# Altium PCB DSP6748_F.PcbDoc (part 1 of 16)
Units mil, origin at the board's own origin, x right, y up, seen from the top; angles counter-clockwise.
Board outline 8188.98 x 4055.12 mil, 4 copper layers (Top Layer, GND, VCC, Bottom Layer); 409 components, 262 nets, 1424 pads, 350 vias.
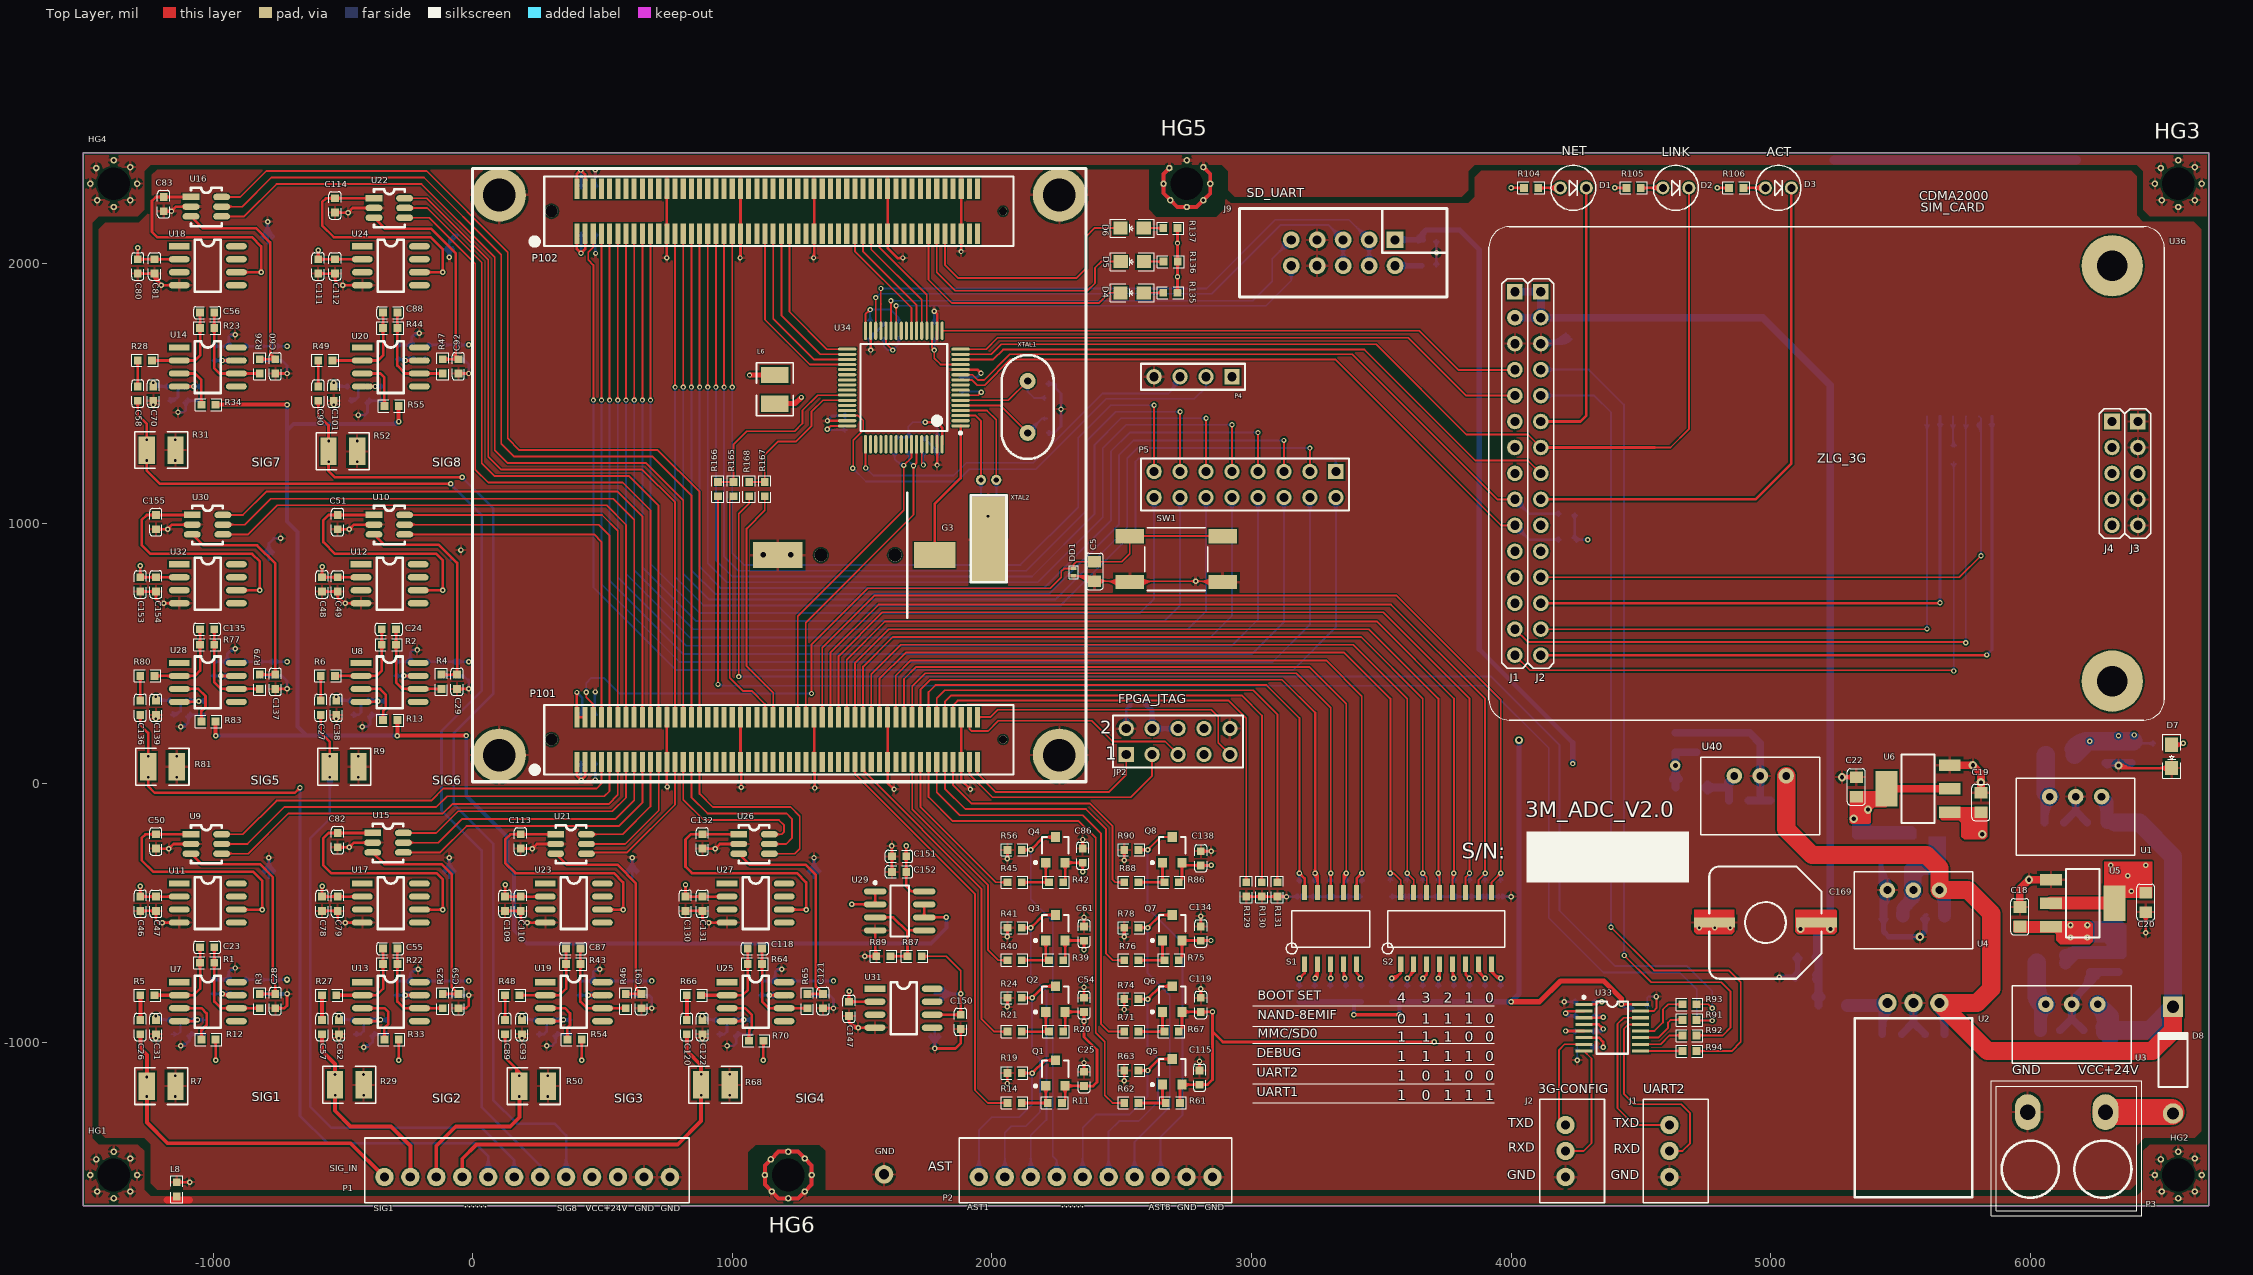
[diagram p0: Top Layer view]
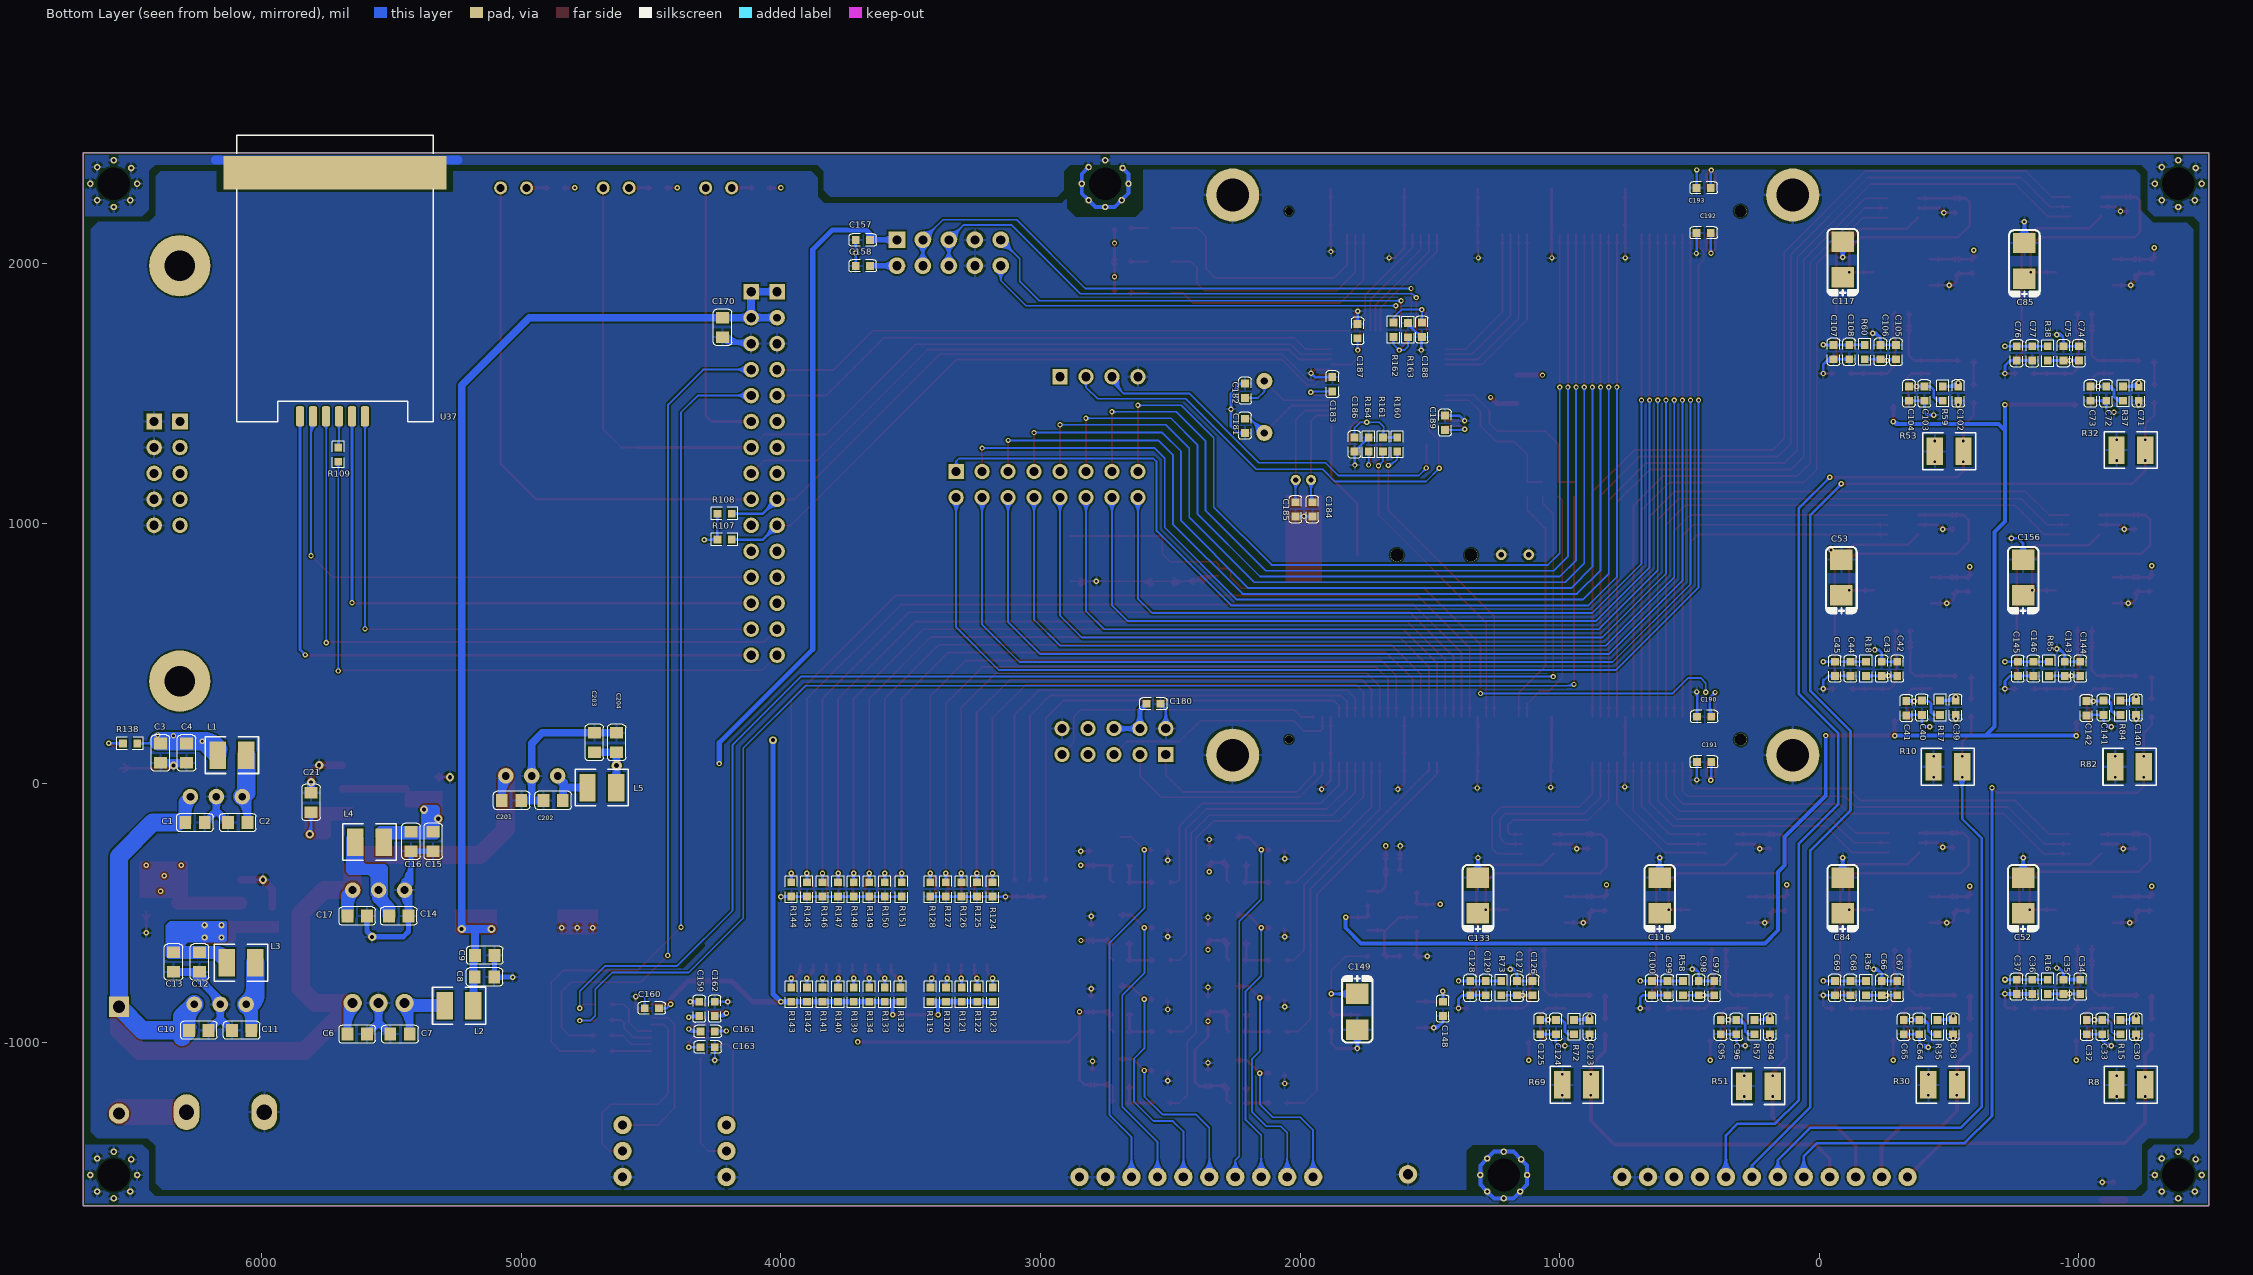
[diagram p1: Bottom Layer view, seen from below]
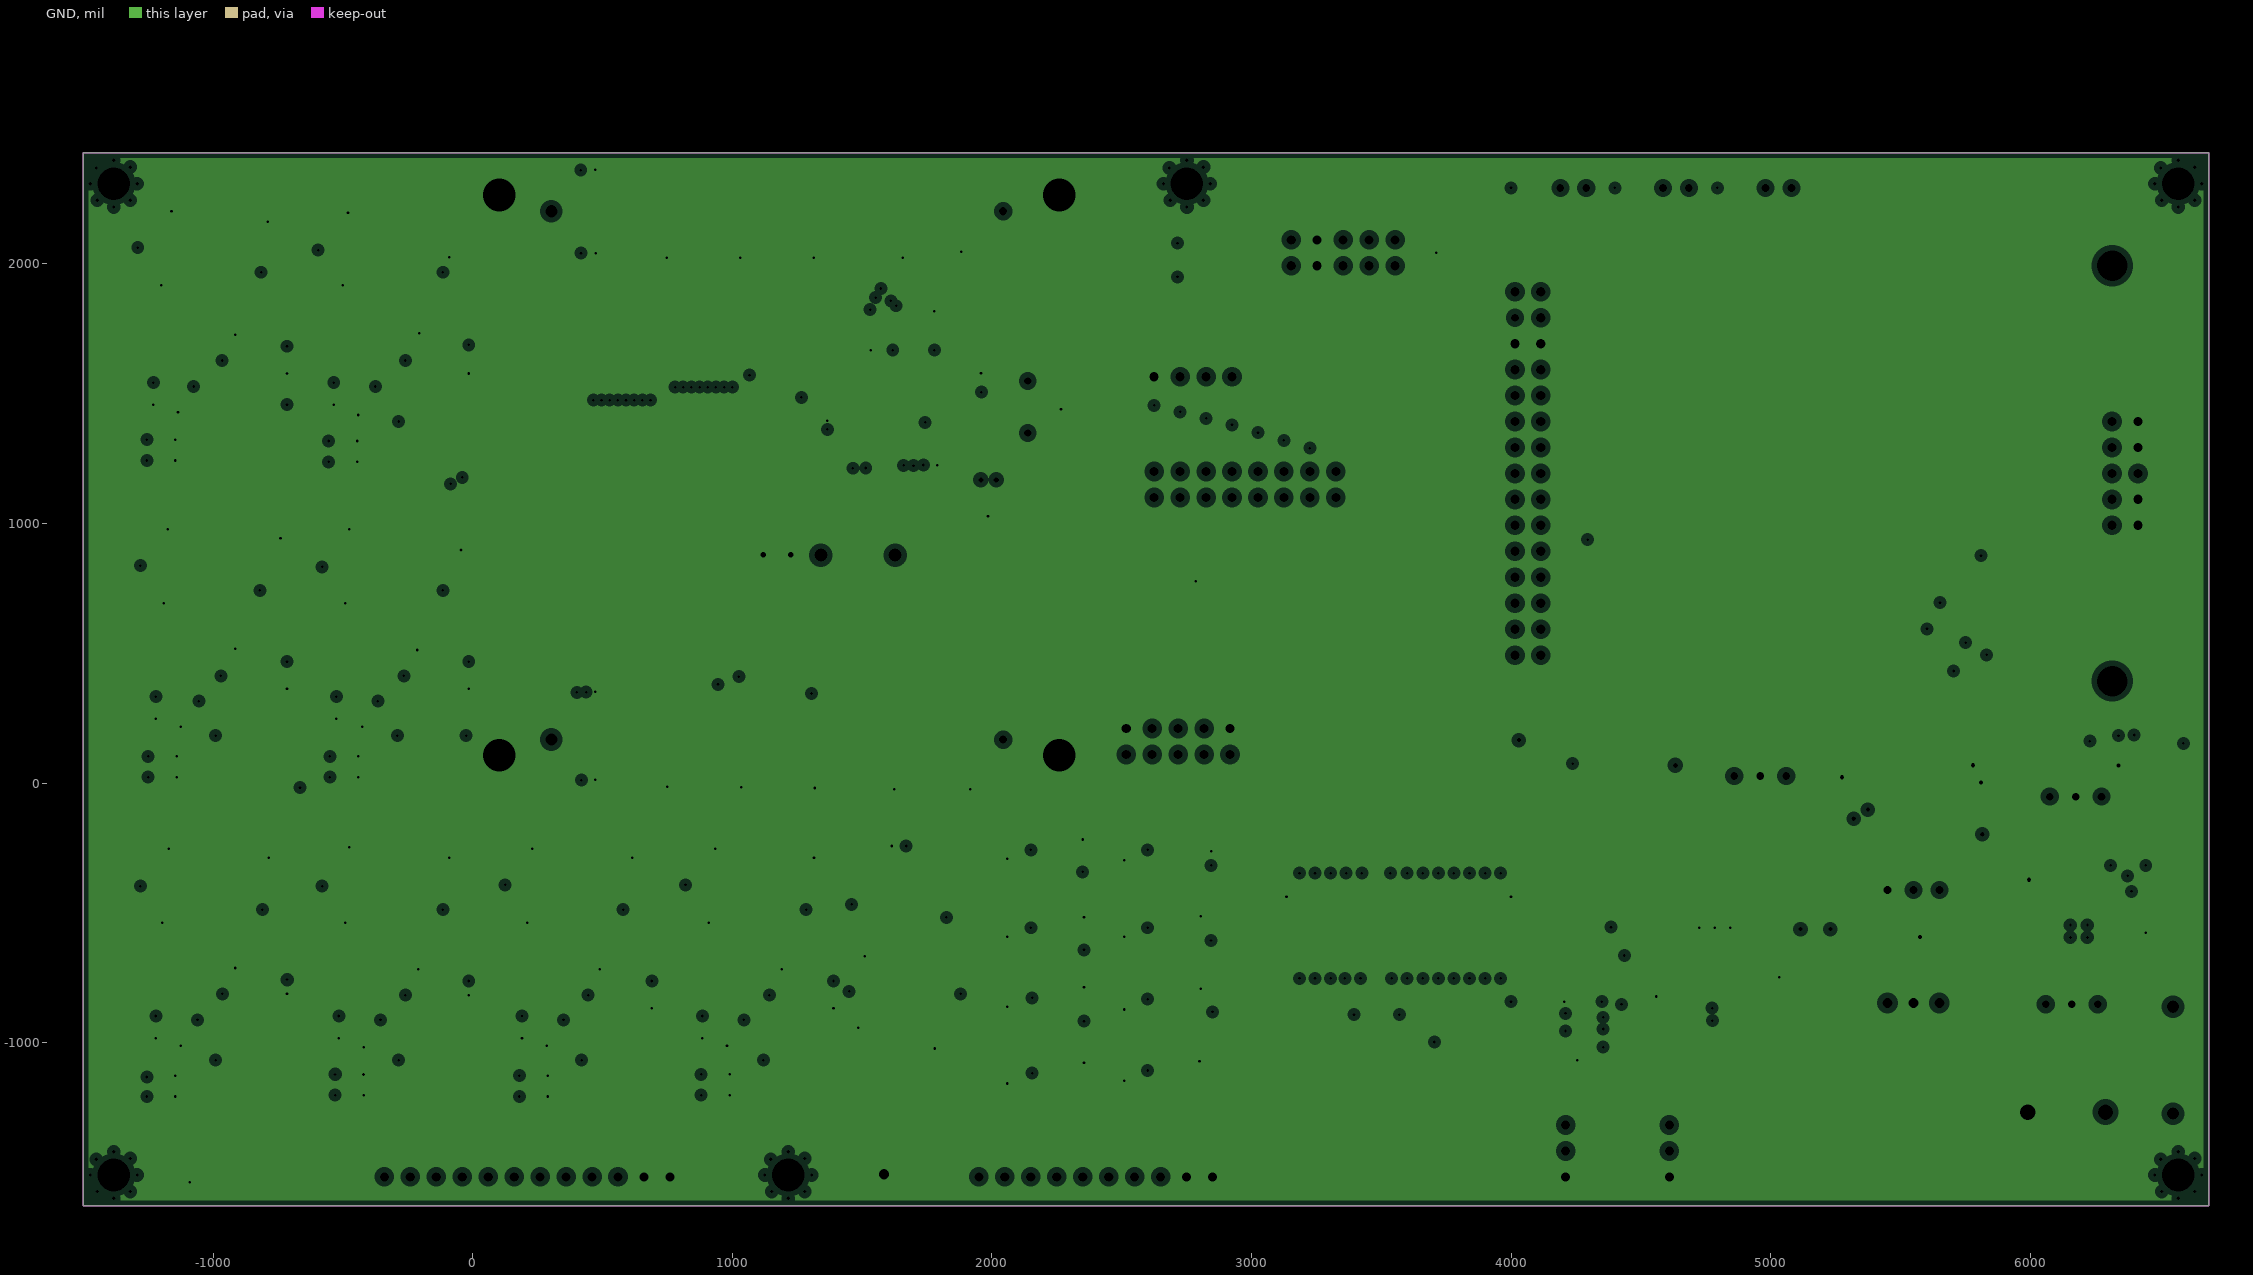
[diagram p2: GND, clearances drawn from the general rule]
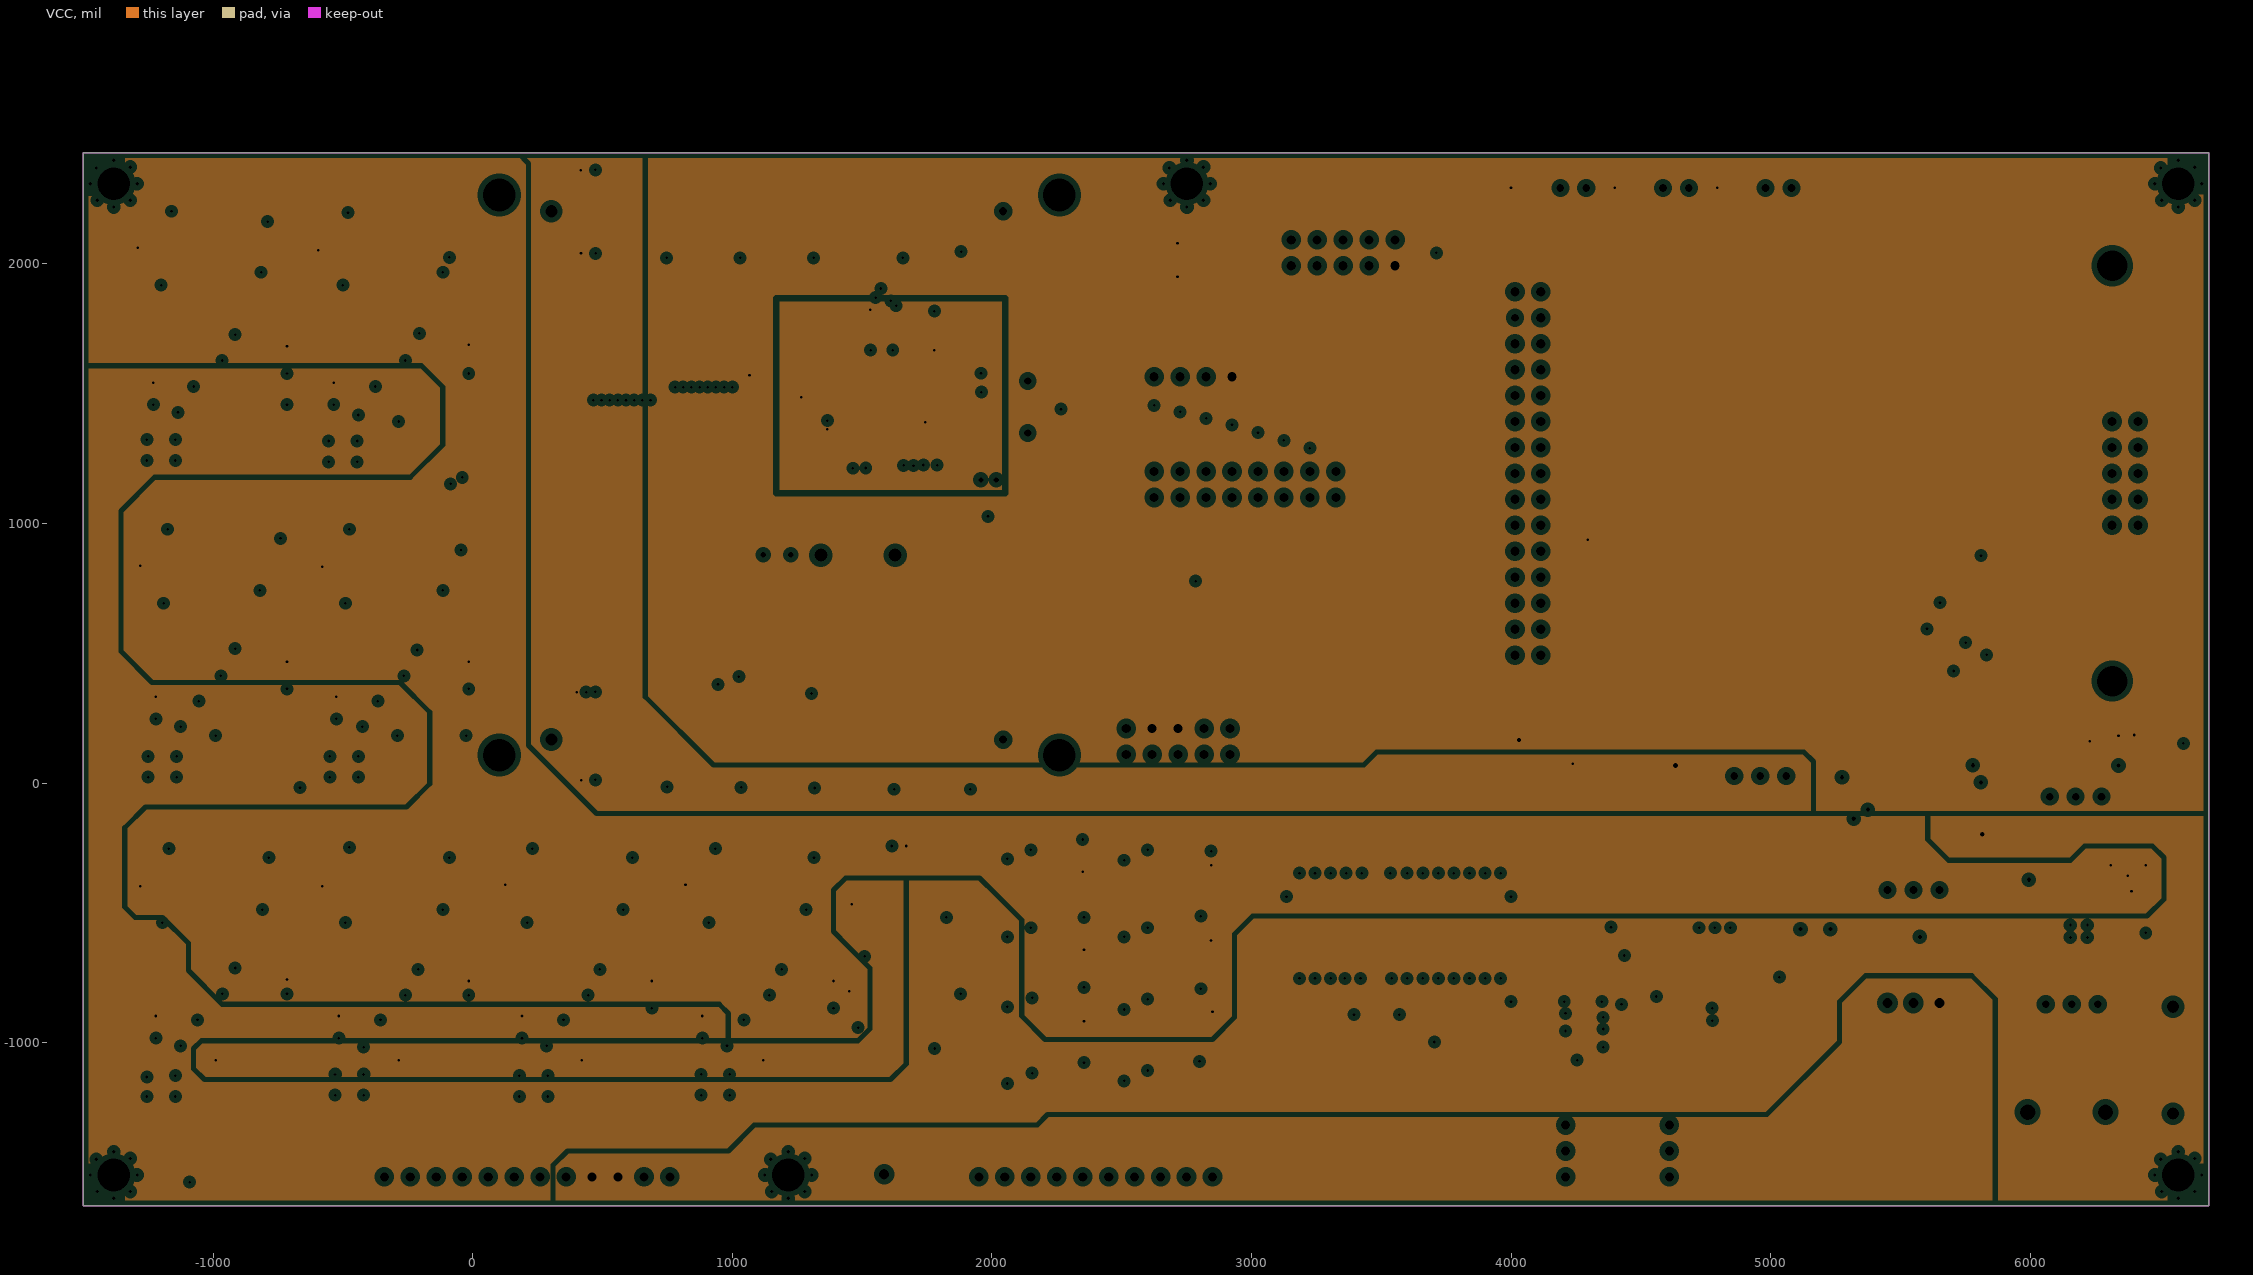
[diagram p3: VCC, clearances drawn from the general rule]

## Layer stack, top to bottom
Top Solder: solder mask 0.4, Solder Resist, Dk 3.5
Top Layer: signal copper 1.4
Dielectric1: core 12.6, FR-4, Dk 4.8
GND: plane copper 1.4, net GND
Dielectric2: prepreg 12.6, FR-4, Dk 4.8
VCC: plane copper 1.4, net (Multiple Nets)
Dielectric3: core 12.6, FR-4, Dk 4.8
Bottom Layer: signal copper 1.4
Bottom Solder: solder mask 0.4, Solder Resist, Dk 3.5

## Board outline
-1500.82,-1628.11 6688.16,-1628.11 6688.16,2427.01 -1500.82,2427.01

## Design rules (kind name [scope] priority, off if disabled: settings)
Clearance [All] p1: gap=6
ComponentClearance [All] p1: gap=6 collisioncheckmode=3 verticalgap=6 showdistances=FALSE
FabricationTestPointUsage TestPointUsage [All] p1: valid=0 allowmultiple=FALSE
FabricationTestpoint Testpoint [(IsPad And (OnTopLayer Or OnBottomLayer))] p1: side=3 testpointundercomponent=TRUE minsize=40 maxsize=100 preferedsize=60 minholesize=0 maxholesize=40 preferedholesize=32 testpointgrid=1 allowsidetop=TRUE allowsidebottom=TRUE usegrid=TRUE gridtolerance=0.01
HoleSize [All] p1: absolutevalues=TRUE maxlimit=200 minlimit=1 maxpercent=80.000 minpercent=20.000
HoleToHoleClearance [All] p1: gap=6 allowstackedmicrovias=TRUE
MinimumSolderMaskSliver [All] p1: minsoldermaskwidth=1
PlaneClearance [All] p1: clearance=20
PlaneConnect [All] p1: planeconnectstyle=Relief reliefexpansion=20 reliefentries=4 reliefconductorwidth=10 reliefairgap=10
PolygonConnect [All] p1: connectstyle=Relief reliefconductorwidth=10 reliefentries=4 polygonreliefangle="90 Angle" airgapwidth=10
RoutingVias [All] p1: holewidth=12 width=24 viastyle="Through Hole" minholewidth=8 minwidth=15 maxholewidth=28 maxwidth=50
SilkToSilkClearance [All] p1: silktosilkclearance=2
SilkToSolderMaskClearance SilkscreenOverComponentPads [IsPad] p1: minsilkscreentomaskgap=0 clearancetoexposedcopper=TRUE
SolderMaskExpansion [All] p1: expansion=4
Width [All] p1: maxlimit=100 minlimit=6 preferedwidth=7
19 further rules are at their usual default settings.

## Classes and differential pairs
component class "Page K_B2B_D": C192 C193 P5 P102
component class "Page H_B2B_A": C190 C191 HG1 HG2 HG3 HG4 HG5 HG6 L8 P101
component class "Page E_Micro_SD": C157 C158 C181 C182 C183 C184 C185 C186 C187 C188 C189 J9 P4 R160 R161 R162 R163 R164 R165 R166 R167 R168 U34 XTAL1 XTAL2
component class "Page C_ExCONNECTOR": C180 D4 D5 D6 D7 JP2 R119 R120 R121 R122 R123 R124 R125 R126 R127 R128 R129 R130 R131 R132 R133 R134 R135 R136 R137 R138 R139 R140 R141 R142 R143 R144 R145 R146 R147 R148 R149 R150 R151 S1 S2
component class "Page B_SignalInput": C23 C24 C25 C26 C27 C28 C29 C30 C31 C32 C33 C34 C35 C36 C37 C38 C39 C40 C41 C42 C43 C44 C45 C46 C47 C48 C49 C50 C51 C52 C53 C54 C55 C56 C57 C58 C59 C60 C61 C62 C63 C64 C65 C66 C67 C68 C69 C70 C71 C72 C73 C74 C75 C76 C77 C78 C79 C80 C81 C82 C83 C84 C85 C86 C87 C88 C89 C90 C91 C92 C93 C94 C95 C96 C97 C98 C99 C100 C101 C102 C103 C104 C105 C106 C107 C108 C109 C110 C111 C112 C113 C114 C115 C116 C117 C118 C119 C120 C121 C122 C123 C124 C125 C126 C127 C128 C129 C130 C131 C132 C133 C134 C135 C136 C137 C138 C139 C140 C141 C142 C143 C144 C145 C146 C147 C148 C149 C150 C151 C152 C153 C154 C155 C156 P1 P2 Q1 Q2 Q3 Q4 Q5 Q6 Q7 Q8 R1 R2 R3 R4 R5 R6 R7 R8 R9 R10 R11 R12 R13 R14 R15 R16 R17 R18 R19 R20 R21 R22 R23 R24 R25 R26 R27 R28 R29 R30 R31 R32 R33 R34 R35 R36 R37 R38 R39 R40 R41 R42 R43 R44 R45 R46 R47 R48 R49 R50 R51 R52 R53 R54 R55 R56 R57 R58 R59 R60 R61 R62 R63 R64 R65 R66 R67 R68 R69 R70 R71 R72 R73 R74 R75 R76 R77 R78 R79 R80 R81 R82 R83 R84 R85 R86 R87 R88 R89 R90 U7 U8 U9 U10 U11 U12 U13 U14 U15 U16 U17 U18 U19 U20 U21 U22 U23 U24 U25 U26 U27 U28 U29 U30 U31 U32
component class "Page A_Power": C1 C2 C3 C4 C5 C6 C7 C8 C9 C10 C11 C12 C13 C14 C15 C16 C17 C18 C19 C20 C21 C22 C201 C202 C203 C204 D8 DD1 DSW1 G3 L1 L2 L3 L4 L5 L6 P3 SW1 U1 U2 U3 U4 U5 U6 U40
component class "Page G_ZLG_3G": C159 C160 C161 C162 C163 C169 C170 D1 D2 D3 J1 J2 R91 R92 R93 R94 R104 R105 R106 R107 R108 R109 U33 U36 U37

## Components (designator, comment, footprint, x,y, rotation, side; value= is the part's Value field where it differs from the comment)
C1 "106" 0805C 6294.81,-152.48 r180 bottom
C2 "226" 0805C 6054.81,-152.48 r0 bottom
C3 "226" 0805C 6389.81,152.52 r270 bottom
C4 "104" 0805C 6289.81,152.52 r270 bottom
C5 "104" 0805C 2394.77,852.52 r270 top
C6 "106" 0805C 5669.81,-967.48 r180 bottom
C7 "106" 0805C 5429.81,-967.48 r0 bottom
C8 "226" 0805C 5179.81,-747.48 r180 bottom
C9 "104" 0805C 5178.41,-663.52 r180 bottom
C10 "106" 0805C 6279.81,-952.48 r180 bottom
C11 "106" 0805C 6039.81,-952.48 r0 bottom
C12 "226" 0805C 6239.81,-652.48 r270 bottom
C13 "104" 0805C 6339.81,-652.48 r270 bottom
C14 "106" 0805C 5509.81,-512.48 r180 bottom
C15 "106" 0805C 5339.81,-187.48 r270 bottom
C16 "104" 0805C 5424.81,-187.48 r270 bottom
C17 "106" 0805C 5669.81,-512.48 r180 bottom
C18 "106" 0805C 5959.81,-552.48 r90 top
C19 "106" 0805C 5809.81,-112.48 r90 top
C20 "226" 0805C 6444.81,-422.48 r270 top
C21 "104" 0805C 5809.81,-112.48 r90 bottom
C22 "106" 0805C 5329.81,-52.48 r90 top
C23 "15p" 0603C -995.19,-632.48 r180 top
C24 "15p" 0603C -295.19,592.52 r180 top
C25 "104" 0603C 2354.81,-1112.48 r270 top
C26 "104" 0603C -1280.19,-967.48 r90 top
C27 "104" 0603C -585.19,262.52 r90 top
C28 "102" 0603C -760.19,-867.48 r90 top
C29 "102" 0603C -60.19,362.52 r90 top
C30 "106" 0603C -1220.19,-967.48 r90 bottom
C31 "104" 0603C -1220.19,-967.48 r90 top
C32 "475" 0603C -1030.19,-967.48 r90 bottom
C33 "104" 0603C -1090.19,-967.48 r90 bottom
C34 "475" 0603C -1005.19,-757.48 r270 bottom
C35 "104" 0603C -940.19,-757.48 r270 bottom
C36 "106" 0603C -820.19,-812.48 r90 bottom
C37 "104" 0603C -760.19,-812.48 r90 bottom
C38 "106" 0603C -525.19,262.52 r90 top
C39 "104" 0603C -525.19,262.52 r90 bottom
C40 "475" 0603C -395.19,262.52 r90 bottom
C41 "104" 0603C -335.19,260.52 r90 bottom
C42 "475" 0603C -300.19,467.52 r270 bottom
C43 "104" 0603C -240.19,467.52 r270 bottom
C44 "106" 0603C -120.19,412.52 r90 bottom
C45 "104" 0603C -60.19,412.52 r90 bottom
C46 "106" 0603C -1280.19,-492.48 r90 top
C47 "104" 0603C -1220.19,-492.48 r90 top
C48 "106" 0603C -580.19,737.52 r90 top
C49 "104" 0603C -520.19,737.52 r90 top
C50 "104" 0603C -1220.19,-252.48 r90 top
C51 "104" 0603C -520.19,977.52 r90 top
C52 "1uF/16V-B" TCC-B -785.19,-502.48 r90 bottom
C53 "1uF/16V-B" TCC-B -85.19,722.52 r90 bottom
C54 "104" 0603C 2354.81,-827.48 r270 top
C55 "15p" 0603C -290.19,-637.48 r180 top
C56 "15p" 0603C -995.19,1812.52 r180 top
C57 "104" 0603C -580.19,-967.48 r90 top
C58 "104" 0603C -1290.19,1472.52 r90 top
C59 "102" 0603C -55.19,-867.48 r90 top
C60 "102" 0603C -760.19,1577.52 r90 top
C61 "104" 0603C 2354.81,-552.48 r270 top
C62 "106" 0603C -515.19,-967.48 r90 top
C63 "104" 0603C -515.19,-967.48 r90 bottom
C64 "475" 0603C -385.19,-967.48 r90 bottom
C65 "104" 0603C -325.19,-967.48 r90 bottom
C66 "475" 0603C -240.19,-762.48 r270 bottom
C67 "104" 0603C -300.19,-762.48 r270 bottom
C68 "106" 0603C -120.19,-817.48 r90 bottom
C69 "104" 0603C -60.19,-817.48 r90 bottom
C70 "106" 0603C -1230.19,1472.52 r90 top
C71 "104" 0603C -1230.19,1472.52 r90 bottom
C72 "475" 0603C -1105.19,1472.52 r90 bottom
C73 "104" 0603C -1045.19,1472.52 r90 bottom
C74 "475" 0603C -1000.19,1682.52 r270 bottom
C75 "104" 0603C -940.19,1682.52 r270 bottom
C76 "106" 0603C -760.19,1627.52 r90 bottom
C77 "104" 0603C -820.19,1627.52 r90 bottom
C78 "106" 0603C -580.19,-492.48 r90 top
C79 "104" 0603C -520.19,-492.48 r90 top
C80 "106" 0603C -1290.19,1962.52 r90 top
C81 "104" 0603C -1225.19,1962.52 r90 top
C82 "104" 0603C -520.19,-247.48 r90 top
C83 "104" 0603C -1190.19,2202.52 r90 top
C84 "1uF/16V-B" TCC-B -90.19,-502.48 r90 bottom
C85 "1uF/16V-B" TCC-B -790.19,1942.52 r90 bottom
C86 "104" 0603C 2349.81,-252.48 r270 top
C87 "15p" 0603C 414.81,-637.48 r180 top
C88 "15p" 0603C -290.19,1812.52 r180 top
C89 "104" 0603C 124.81,-967.48 r90 top
C90 "104" 0603C -595.19,1472.52 r90 top
C91 "102" 0603C 649.81,-867.48 r90 top
C92 "102" 0603C -55.19,1577.52 r90 top
C93 "106" 0603C 189.81,-967.48 r90 top
C94 "104" 0603C 189.81,-967.48 r90 bottom
C95 "475" 0603C 379.81,-967.48 r90 bottom
C96 "104" 0603C 319.81,-967.48 r90 bottom
C97 "475" 0603C 404.81,-762.48 r270 bottom
C98 "104" 0603C 464.81,-762.48 r270 bottom
C99 "106" 0603C 584.81,-817.48 r90 bottom
C100 "104" 0603C 644.81,-817.48 r90 bottom
C101 "106" 0603C -535.19,1472.52 r90 top
C102 "104" 0603C -535.19,1472.52 r90 bottom
C103 "475" 0603C -405.19,1472.52 r90 bottom
C104 "104" 0603C -345.19,1527.52 r270 bottom
C105 "475" 0603C -295.19,1687.52 r270 bottom
C106 "104" 0603C -235.19,1687.52 r270 bottom
C107 "106" 0603C -55.19,1632.52 r90 bottom
C108 "104" 0603C -115.19,1632.52 r90 bottom
C109 "106" 0603C 124.81,-492.48 r90 top
C110 "104" 0603C 184.81,-492.48 r90 top
C111 "106" 0603C -595.19,1962.52 r90 top
C112 "104" 0603C -530.19,1962.52 r90 top
C113 "104" 0603C 184.81,-252.48 r90 top
C114 "104" 0603C -530.19,2197.52 r90 top
C115 "104" 0603C 2799.81,-1107.48 r270 top
C116 "1uF/16V-B" TCC-B 614.81,-502.48 r90 bottom
C117 "1uF/16V-B" TCC-B -90.19,1947.52 r90 bottom
C118 "15p" 0603C 1114.81,-637.48 r180 top
C119 "104" 0603C 2804.81,-827.48 r270 top
C120 "104" 0603C 824.81,-967.48 r90 top
C121 "102" 0603C 1349.81,-867.48 r90 top
C122 "106" 0603C 884.81,-967.48 r90 top
C123 "104" 0603C 884.81,-967.48 r90 bottom
C124 "475" 0603C 1014.81,-967.48 r90 bottom
C125 "104" 0603C 1074.81,-967.48 r90 bottom
C126 "475" 0603C 1104.81,-762.48 r270 bottom
C127 "104" 0603C 1164.81,-762.48 r270 bottom
C128 "106" 0603C 1344.81,-817.48 r90 bottom
C129 "104" 0603C 1284.81,-817.48 r90 bottom
C130 "106" 0603C 819.81,-492.48 r90 top
C131 "104" 0603C 884.81,-492.48 r90 top
C132 "104" 0603C 884.81,-252.48 r90 top
C133 "1uF/16V-B" TCC-B 1314.81,-502.48 r90 bottom
C134 "104" 0603C 2804.81,-552.48 r270 top
C135 "15p" 0603C -995.19,592.52 r180 top
C136 "104" 0603C -1280.19,262.52 r90 top
C137 "102" 0603C -760.19,362.52 r90 top
C138 "104" 0603C 2804.81,-262.48 r270 top
C139 "106" 0603C -1220.19,262.52 r90 top
C140 "104" 0603C -1220.19,262.52 r90 bottom
C141 "475" 0603C -1095.19,262.52 r90 bottom
C142 "104" 0603C -1029.19,260.52 r90 bottom
C143 "475" 0603C -945.19,467.52 r270 bottom
C144 "104" 0603C -1005.19,467.52 r270 bottom
C145 "106" 0603C -765.19,412.52 r90 bottom
C146 "104" 0603C -825.19,412.52 r90 bottom
C147 "104" 0603C 1449.81,-897.48 r90 top
C148 "106" 0603C 1449.81,-897.48 r90 bottom
C149 "1uF/16V-B" TCC-B 1779.81,-812.48 r270 bottom
C150 "104" 0603C 1879.81,-947.48 r90 top
C151 "104" 0603C 1614.81,-282.48 r0 top
C152 "106" 0603C 1614.81,-342.48 r0 top
C153 "106" 0603C -1280.19,737.52 r90 top
C154 "104" 0603C -1220.19,737.52 r90 top
C155 "104" 0603C -1220.19,977.52 r90 top
C156 "1uF/16V-B" TCC-B -785.19,722.52 r90 bottom
C157 "104" 0603C 3712.15,2091.52 r180 bottom
C158 "104" 0603C 3712.15,1991.52 r180 bottom
C159 "104" 0603C 4314.81,-842.48 r270 bottom
C160 "104" 0603C 4524.81,-867.48 r180 bottom
C161 "104" 0603C 4309.81,-957.48 r180 bottom
C162 "104" 0603C 4254.81,-897.48 r90 bottom
C163 "104" 0603C 4309.81,-1017.48 r180 bottom
C169 "1000uF/25V" C_10_10MM 4979.81,-537.48 r270 top
C170 "104" 0805C 4224.81,1792.52 r270 bottom
C180 "104" 0603C 2592.29,305 r180 bottom
C181 "20p" 0603C 2212.81,1403.57 r270 bottom
C182 "20p" 0603C 2211.82,1483.46 r90 bottom
C183 "104" 0603C 1875.81,1563.52 r270 bottom
C184 "15p" 0603C 1952.81,1026.52 r90 bottom
C185 "15p" 0603C 2017.81,1026.52 r90 bottom
C186 "104" 0603C 1790.81,1276.52 r90 bottom
C187 "104" 0603C 1778.81,1768.52 r270 bottom
C188 "104" 0603C 1530.81,1718.52 r90 bottom
C189 "104" 0603C 1442.31,1415.25 r270 bottom
C190 "104" 0603C 470.86,255.52 r180 bottom
C191 "104" 0603C 471.57,80.91 r180 bottom
C192 "104" 0603C 472.78,2118.78 r180 bottom
C193 "104" 0603C 472.78,2292 r180 bottom
C201 "106" 0805C 5074.81,-67.48 r180 bottom
C202 "226" 0805C 4839.81,-67.48 r0 bottom
C203 "226" 0805C 4718.81,118.33 r90 bottom
C204 "104" 0805C 4632.81,118.33 r90 bottom
D1 "LED" LED_3MM 4189.81,2292.52 r0 top
D2 "LED" LED_3MM 4584.81,2292.52 r0 top
D3 "LED" LED_3MM 4979.81,2292.52 r0 top
D4 "LED" 0805-LED 2535.15,1888.52 r180 top
D5 "LED" 0805-LED 2536.15,2008.52 r180 top
D6 "LED" 0805-LED 2535.15,2137.52 r180 top
D7 "LED" 0805-LED 6544.81,97.52 r270 top
D8 "1N4007" DO-41 6549.81,-1067.48 r90 top
DD1 "PESD3V3S1UL" SOD882 2314.77,812.52 r270 top
G3 "CON_BATTERY" CON_BATTERY_CR1220 1479.15,877.52 r270 top
HG1 "MOUNTING_HOLE_NL" th126_196c_13c -1382.71,-1510 r0 top
HG2 "MOUNTING_HOLE_NL" th126_196c_13c 6570.05,-1510 r0 top
HG3 "MOUNTING_HOLE_NL" th126_196c_13c 6570.05,2308.9 r0 top
HG4 "MOUNTING_HOLE_NL" th126_196c_13c -1382.71,2308.9 r0 top
HG5 "MOUNTING_HOLE_NL" th126_196c_13c 2751.15,2308.9 r0 top
HG6 "MOUNTING_HOLE_NL" th126_196c_13c 1215.72,-1510 r0 top
J1 "" CHAZUO3*2.54 4609.81,-1417.48 r0 top
J2 "" CHAZUO3*2.54 4209.81,-1417.48 r0 top
J9 "SDV600" JTAG10PW 3553.15,2092.52 r180 top
JP2 "FPGA JTAG" HDR2X5 2517.29,110 r0 top
L1 "22uH" 1210 6114.81,107.52 r0 bottom
L2 "22uH" 1210 5239.81,-857.48 r180 bottom
L3 "22uH" 1210 6079.81,-692.48 r0 bottom
L4 "22uH" 1210 5584.81,-227.48 r180 bottom
L5 "22uH" 1210 4689.81,-17.48 r180 bottom
L6 "22uH" 1210 1164.15,1516.52 r270 top
L8 "220R/100MHz 2A" 0603R -1140.19,-1537.48 r270 top
P1 "Header 12" CHAZUO12*2.54 59.81,-1517.48 r90 top locked
P2 "Header 10" CHAZUO10*2.54 2349.81,-1517.48 r90 top locked
P3 "Header 2" 7.62-2P 5989.81,-1267.48 r0 top
P4 "SWD" HDR1X4 2925,1565 r180 top
P5 "扩展接口" HDR2X8_CEN 3325,1200 r180 top
P101 "P*" IDC100-05MM-SMD 1149.81,167.52 r90 top locked
P102 "P102" IDC100-05MM-SMD 1149.81,2202.52 r90 top locked
Q1 "8550_PNP" SOT-23 2244.81,-1117.48 r0 top
Q2 "8550_PNP" SOT-23 2244.81,-832.48 r0 top
Q3 "8550_PNP" SOT-23 2244.81,-557.48 r0 top
Q4 "8550_PNP" SOT-23 2244.81,-257.48 r0 top
Q5 "8550_PNP" SOT-23 2694.81,-1112.48 r0 top
Q6 "8550_PNP" SOT-23 2694.81,-832.48 r0 top
Q7 "8550_PNP" SOT-23 2694.81,-557.48 r0 top
Q8 "8550_PNP" SOT-23 2694.81,-257.48 r0 top
R1 "3.01K" 0603R -1050.19,-692.48 r0 top
R2 "3.01K" 0603R -350.19,532.52 r0 top
R3 "22" 0603R -820.19,-867.48 r90 top
R4 "22" 0603R -120.19,362.52 r90 top
R5 "20K" 0603R -1280.19,-817.48 r0 top
R6 "20K" 0603R -585.19,412.52 r0 top
R7 "100Ω" 1210 -1200.19,-1167.48 r180 top
R8 "100Ω" 1210 -1200.19,-1162.48 r180 bottom
R9 "100Ω" 1210 -495.19,62.52 r180 top
R10 "100Ω" 1210 -495.19,62.52 r180 bottom
R11 "10K_5%" 0603R 2214.81,-1232.48 r0 top
R12 "2.61K" 0603R -990.19,-987.48 r180 top
R13 "2.61K" 0603R -290.19,242.52 r180 top
R14 "2K_5%" 0603R 2059.81,-1232.48 r0 top
R15 "22" 0603R -1160.19,-912.48 r270 bottom
R16 "22" 0603R -880.19,-812.48 r90 bottom
R17 "22" 0603R -465.19,317.52 r270 bottom
R18 "22" 0603R -180.19,412.52 r90 bottom
R19 "10K_5%" 0603R 2059.81,-1117.48 r0 top
R20 "10K_5%" 0603R 2219.81,-957.48 r0 top
R21 "2K_5%" 0603R 2059.81,-957.48 r0 top
R22 "3.01K" 0603R -345.19,-697.48 r0 top
R23 "3.01K" 0603R -1050.19,1752.52 r0 top
R24 "10K_5%" 0603R 2059.81,-827.48 r0 top
R25 "22" 0603R -115.19,-867.48 r90 top
R26 "22" 0603R -820.19,1577.52 r90 top
R27 "20K" 0603R -580.19,-817.48 r0 top
R28 "20K" 0603R -1290.19,1627.52 r0 top
R29 "100Ω" 1210 -475.19,-1162.48 r180 top
R30 "100Ω" 1210 -475.19,-1162.48 r180 bottom
R31 "100Ω" 1210 -1200.19,1282.52 r180 top
R32 "100Ω" 1210 -1200.19,1282.52 r180 bottom
R33 "2.61K" 0603R -285.19,-987.48 r180 top
R34 "2.61K" 0603R -990.19,1457.52 r180 top
R35 "22" 0603R -455.19,-912.48 r270 bottom
R36 "22" 0603R -180.19,-817.48 r90 bottom
R37 "22" 0603R -1170.19,1527.52 r270 bottom
R38 "22" 0603R -880.19,1627.52 r90 bottom
R39 "10K_5%" 0603R 2219.81,-682.48 r0 top
R40 "2K_5%" 0603R 2059.81,-682.48 r0 top
R41 "10K_5%" 0603R 2059.81,-557.48 r0 top
R42 "10K_5%" 0603R 2219.81,-382.48 r0 top
R43 "3.01K" 0603R 359.81,-697.48 r0 top
R44 "3.01K" 0603R -345.19,1752.52 r0 top
R45 "2K_5%" 0603R 2059.81,-382.48 r0 top
R46 "22" 0603R 589.81,-867.48 r90 top
R47 "22" 0603R -115.19,1577.52 r90 top
R48 "20K" 0603R 124.81,-817.48 r0 top
R49 "20K" 0603R -595.19,1627.52 r0 top
R50 "100Ω" 1210 234.81,-1167.48 r180 top
R51 "100Ω" 1210 234.81,-1167.48 r180 bottom
R52 "100Ω" 1210 -500.19,1277.52 r180 top
R53 "100Ω" 1210 -500.19,1277.52 r180 bottom
R54 "2.61K" 0603R 419.81,-987.48 r180 top
R55 "2.61K" 0603R -285.19,1452.52 r180 top
R56 "10K_5%" 0603R 2059.81,-257.48 r0 top
R57 "22" 0603R 249.81,-912.48 r270 bottom
R58 "22" 0603R 524.81,-817.48 r90 bottom
R59 "22" 0603R -475.19,1527.52 r270 bottom
R60 "22" 0603R -175.19,1632.52 r90 bottom
R61 "10K_5%" 0603R 2669.81,-1232.48 r0 top
R62 "2K_5%" 0603R 2509.81,-1232.48 r0 top
R63 "10K_5%" 0603R 2509.81,-1107.48 r0 top
R64 "3.01K" 0603R 1059.81,-697.48 r0 top
R65 "22" 0603R 1289.81,-867.48 r90 top
R66 "20K" 0603R 824.81,-817.48 r0 top
R67 "10K_5%" 0603R 2664.81,-957.48 r0 top
R68 "100Ω" 1210 934.81,-1162.48 r180 top
R69 "100Ω" 1210 934.81,-1162.48 r180 bottom
R70 "2.61K" 0603R 1119.81,-992.48 r180 top
R71 "2K_5%" 0603R 2509.81,-957.48 r0 top
R72 "22" 0603R 944.81,-912.48 r270 bottom
R73 "22" 0603R 1224.81,-817.48 r90 bottom
R74 "10K_5%" 0603R 2509.81,-832.48 r0 top
R75 "10K_5%" 0603R 2664.81,-682.48 r0 top
R76 "2K_5%" 0603R 2509.81,-682.48 r0 top
R77 "3.01K" 0603R -1050.19,532.52 r0 top
R78 "10K_5%" 0603R 2509.81,-557.48 r0 top
R79 "22" 0603R -820.19,362.52 r90 top
R80 "20K" 0603R -1280.19,412.52 r0 top
R81 "100Ω" 1210 -1195.19,62.52 r180 top
R82 "100Ω" 1210 -1195.19,62.52 r180 bottom
R83 "2.61K" 0603R -990.19,237.52 r180 top
R84 "22" 0603R -1160.19,317.52 r270 bottom
R85 "22" 0603R -885.19,412.52 r90 bottom
R86 "10K_5%" 0603R 2664.81,-382.48 r0 top
R87 "13K_1%" 0603R 1674.81,-667.48 r0 top
R88 "2K_5%" 0603R 2509.81,-382.48 r0 top
R89 "10K_1%" 0603R 1554.81,-667.48 r0 top
R90 "10K_5%" 0603R 2509.81,-257.48 r0 top
R91 "0" 0603R 4714.81,-912.48 r180 top
R92 "0" 0603R 4714.81,-972.48 r180 top
R93 "0" 0603R 4714.81,-852.48 r180 top
R94 "0" 0603R 4714.81,-1032.48 r180 top
R104 "332_5%" 0603R 4049.81,2292.52 r0 top
R105 "332_5%" 0603R 4444.81,2292.52 r0 top
R106 "332_5%" 0603R 4839.81,2292.52 r0 top
R107 "4.7KΩ" 0603R 4244.81,937.52 r180 bottom
R108 "4.7KΩ" 0603R 4244.81,1037.52 r180 bottom
R109 "NC" 0603R 5705.15,1237.52 r90 bottom
R119 "1K_5%" 0603R 3423.81,-842.48 r90 bottom
R120 "1K_5%" 0603R 3363.81,-842.48 r90 bottom
R121 "1K_5%" 0603R 3303.81,-842.48 r90 bottom
R122 "1K_5%" 0603R 3243.81,-842.48 r90 bottom
R123 "1K_5%" 0603R 3183.81,-842.48 r90 bottom
R124 "51K_5%" 0603R 3184.81,-437.48 r90 bottom
R125 "51K_5%" 0603R 3244.81,-437.48 r90 bottom
R126 "51K_5%" 0603R 3304.81,-437.48 r90 bottom
R127 "51K_5%" 0603R 3364.81,-437.48 r90 bottom
R128 "51K_5%" 0603R 3424.81,-437.48 r90 bottom
R129 "51K_5%" 0603R 2979.81,-437.48 r90 top
R130 "51K_5%" 0603R 3039.81,-437.48 r90 top
R131 "51K_5%" 0603R 3099.81,-437.48 r90 top
R132 "1K_5%" 0603R 3539.81,-842.48 r90 bottom
R133 "1K_5%" 0603R 3599.81,-842.48 r90 bottom
R134 "1K_5%" 0603R 3659.81,-842.48 r90 bottom
R135 "332_5%" 0603R 2715.15,1888.52 r180 top
R136 "332_5%" 0603R 2716.15,2008.52 r180 top
R137 "332_5%" 0603R 2715.15,2137.52 r180 top
R138 "332_5%" 0603R 6479.81,152.52 r0 bottom
R139 "1K_5%" 0603R 3719.81,-842.48 r90 bottom
R140 "1K_5%" 0603R 3779.81,-842.48 r90 bottom
R141 "1K_5%" 0603R 3839.81,-842.48 r90 bottom
R142 "1K_5%" 0603R 3899.81,-842.48 r90 bottom
R143 "1K_5%" 0603R 3959.81,-842.48 r90 bottom
R144 "51K_5%" 0603R 3959.81,-437.48 r90 bottom
R145 "51K_5%" 0603R 3899.81,-437.48 r90 bottom
R146 "51K_5%" 0603R 3839.81,-437.48 r90 bottom
R147 "51K_5%" 0603R 3779.81,-437.48 r90 bottom
R148 "51K_5%" 0603R 3719.81,-437.48 r90 bottom
R149 "51K_5%" 0603R 3659.81,-437.48 r90 bottom
R150 "51K_5%" 0603R 3599.81,-437.48 r90 bottom
R151 "51K_5%" 0603R 3534.81,-437.48 r90 bottom
R160 "4.7KΩ" 0603R 1625.81,1331.52 r270 bottom
R161 "4.7KΩ" 0603R 1680.81,1331.52 r270 bottom
R162 "10KΩ" 0603R 1640.81,1773.52 r270 bottom
R163 "4.7KΩ" 0603R 1583.91,1717.3 r90 bottom
R164 "4.7KΩ" 0603R 1735.81,1276.52 r90 bottom
R165 "0Ω" 0603R 1005,1105 r90 top
R166 "0Ω" 0603R 945,1105 r90 top
R167 "0Ω" 0603R 1125,1105 r90 top
R168 "0Ω" 0603R 1065,1105 r90 top
S1 "SW DIP-5" SW5-SO 3204.81,-697.48 r0 top
S2 "SW-DIP8" SW8-SO 3574.81,-697.48 r0 top
SW1 "SW PUSHBUTTON-SPST SHIELD_0" BUTTON_SW_SMD_4P_BIG 2709.77,862.52 r90 top
U1 "K7803-1000" K78xx-500R2 6174.81,-52.48 r180 top
U2 "K7812-1000(L)" K78xx-L 5549.81,-847.48 r270 top
U3 "K78x6-500R2" K78xx-500R2 6159.81,-852.48 r180 top
U4 "K78x6-500R2" K78xx-500R2 5549.81,-412.48 r180 top
U5 "LT1117-5" SOT-223 6079.81,-372.48 r270 top
U6 "LT1175" SOT-223 5689.81,-112.48 r90 top
U7 "AD8027AR-SOIC8" SO-8N -1130.19,-767.48 r0 top
U8 "AD8027AR-SOIC8" SO-8N -430.19,462.52 r0 top
U9 "AD7276BUJZ" SOT-23-6 -1085.19,-197.48 r0 top
U10 "AD7276BUJZ" SOT-23-6 -380.19,1032.52 r0 top
U11 "REF193GSZ" SO-8N -1130.19,-387.48 r0 top
U12 "REF193GSZ" SO-8N -430.19,842.52 r0 top
U13 "AD8027AR-SOIC8" SO-8N -425.19,-767.48 r0 top
U14 "AD8027AR-SOIC8" SO-8N -1130.19,1677.52 r0 top
U15 "AD7276BUJZ" SOT-23-6 -385.19,-192.48 r0 top
U16 "AD7276BUJZ" SOT-23-6 -1085.19,2257.52 r0 top
U17 "REF193GSZ" SO-8N -425.19,-387.48 r0 top
U18 "REF193GSZ" SO-8N -1130.19,2067.52 r0 top
U19 "AD8027AR-SOIC8" SO-8N 279.81,-767.48 r0 top
U20 "AD8027AR-SOIC8" SO-8N -425.19,1677.52 r0 top
U21 "AD7276BUJZ" SOT-23-6 319.81,-197.48 r0 top
U22 "AD7276BUJZ" SOT-23-6 -380.19,2252.52 r0 top
U23 "REF193GSZ" SO-8N 279.81,-387.48 r0 top
U24 "REF193GSZ" SO-8N -425.19,2067.52 r0 top
U25 "AD8027AR-SOIC8" SO-8N 979.81,-767.48 r0 top
U26 "AD7276BUJZ" SOT-23-6 1024.81,-197.48 r0 top
U27 "REF193GSZ" SO-8N 979.81,-387.48 r0 top
U28 "AD8027AR-SOIC8" SO-8N -1130.19,462.52 r0 top
U29 "OP284ES" SO-8_N 1644.81,-492.48 r0 top
U30 "AD7276BUJZ" SOT-23-6 -1080.19,1032.52 r0 top
U31 "REF193GSZ" SO-8N 1549.81,-792.48 r0 top
U32 "REF193GSZ" SO-8N -1130.19,842.52 r0 top
U33 "MAX3232EUE" TSSOP16 4389.81,-942.48 r270 top
U34 "STM32F103RBT6" LQFP64_N 1660.81,1523.52 r180 top
U36 "UART-3G" ZWD_35DP_UART-3G 3914.81,242.52 r0 top locked
U37 "自弹式SIM卡座" SIM_PUSH 5718.15,1392.52 r0 bottom
U40 "K7805-1000" K78xx-500R2 4959.81,27.52 r180 top
XTAL1 "24M" XTAL2 1997.81,1458.52 r180 top
XTAL2 "32K" XTAL_32.768 1957.81,1167.52 r270 top

## Footprints (in the part's own frame and the unit in brackets; to place one, negate y for a bottom-side part, rotate by r counter-clockwise, add the part's x,y. Pads: shape width x height; smd on the part's side, far side on the other; paste and mask are expansions set on the pad)
7.62-2P [mm]
  oval 2.5x3.5 hole 1.511: 1(0,0) 2(7.62,0)
  silkscreen extent -3.56,-10.16 11.18,3.05
0603C [mil]
  rect 30x30 smd: 1(0,0) 2(55,0)
  silkscreen extent -25,-23 80,24
0603R [mil]
  rect 30x30 smd: 1(0,0) 2(55,0)
  silkscreen extent -24,-23 79,24
0805-LED [mil]
  rect 55x50 smd: A(-50,0) K(40,0)
  silkscreen extent -90,-35 80,35
0805C [mil]
  rect 45x50 smd: 1(0,0) 2(75,0)
  silkscreen extent -32,-35 108,35
1210 [mm] "1210"
  rect 1.6x2.7 smd: 1(-1.4,0) 2(1.4,0)
  silkscreen extent -2.6,-1.8 2.6,1.8
BUTTON_SW_SMD_4P_BIG [mil] "BUTTON_SW_SMD_4P_BIG"
  rect 55x110 smd: 1(88.5,178.5) 2(88.5,-179.5) 3(-88.5,178.5) 4(-88.5,-179.5)
  silkscreen extent -121,-122 121,120
C_10_10MM [mm] "铝电解电容"
  rect 1x4 smd: 1(0,5) 2(0,-5)
  silkscreen extent -5.5,-5.5 5.5,5.5
CHAZUO3*2.54 [mm]
  round 1.8 hole 0.9: 1(0,2.54) 2(0,0) 3(0,-2.54)
  silkscreen extent -2.54,-5.08 3.81,5.08
CHAZUO10*2.54 [mm]
  round 1.8 hole 0.9: 1(0,10.16) 2(0,7.62) 3(0,5.08) 4(0,2.54) 5(0,0) 6(0,-2.54) 7(0,-5.08) 8(0,-7.62) 9(0,-10.16) 10(0,-12.7)
  silkscreen extent -2.54,-14.6 3.81,12.06
CHAZUO12*2.54 [mm]
  round 1.8 hole 0.9: 1(0,10.16) 2(0,7.62) 3(0,5.08) 4(0,2.54) 5(0,0) 6(0,-2.54) 7(0,-5.08) 8(0,-7.62) 9(0,-10.16) 10(0,-12.7) 11(0,-15.24) 12(0,-17.78)
  silkscreen extent -2.54,-19.68 3.81,12.06
CON_BATTERY_CR1220 [mil] "CON_BATTERY_CR1220"
  rect 100x160 smd: 1(0,300)
  rect 100x190 smd: 2(0,-304)
  round 50 hole 50: 3(0,148) 4(0,-138)
  silkscreen extent -291,-291 291,291
DO-41 [mm] "Diode, Axial; Body 5.2 x 2.7 mm (LxDia. max), Lead Dia. 0.86 mm (max)"
  round 2 hole 1.2: 1(-5.23,0)
  rect 2x2 hole 1.2: 2(5.23,0)
  silkscreen extent -2.65,-1.42 2.75,1.4
HDR1X4 [mm] "Connector; Header; 4 Position"
  rect 1.5x1.5 hole 0.9: 1(0,0)
  round 1.5 hole 0.9: 2(2.54,0) 3(5.08,0) 4(7.62,0)
  silkscreen extent -1.27,-1.27 8.89,1.27
HDR2X5 [mm] "Connector; Header; 5x2 Position"
  rect 1.5x1.5 hole 0.9: 1(0,0)
  round 1.5 hole 0.9: 2(0,2.54) 3(2.54,0) 4(2.54,2.54) 5(5.08,0) 6(5.08,2.54) 7(7.62,0) 8(7.62,2.54) 9(10.16,0) 10(10.16,2.54)
  silkscreen extent -1.27,-1.27 11.43,3.81
HDR2X8_CEN [mm] "Connector; Header; 8x2 Position"
  rect 1.5x1.5 hole 0.9: 1(0,0)
  round 1.5 hole 0.9: 2(2.54,0) 3(5.08,0) 4(7.62,0) 5(10.16,0) 6(12.7,0) 7(15.24,0) 8(17.78,0) 9(0,2.54) 10(2.54,2.54) 11(5.08,2.54) 12(7.62,2.54) 13(10.16,2.54) 14(12.7,2.54) 15(15.24,2.54) 16(17.78,2.54)
  silkscreen extent -1.27,-1.27 19.05,3.81
IDC100-05MM-SMD [mm] "IDC100-05MM-SMD"
  rect 2x0.5 smd: 1(-2.2,19.005) 2(2.2,19.005) 3(-2.2,18.205) 4(2.2,18.205) 5(-2.2,17.405) 6(2.2,17.405) 7(-2.2,16.605) 8(2.2,16.605) 9(-2.2,15.805) 10(2.2,15.805) 11(-2.2,15.005) 12(2.2,15.005) 13(-2.2,14.205) 14(2.2,14.205) 15(-2.2,13.405) 16(2.2,13.405) 17(-2.2,12.605) 18(2.2,12.605) 19(-2.2,11.805) 20(2.2,11.805) 21(-2.2,11.005) 22(2.2,11.005) 23(-2.2,10.205) 24(2.2,10.205) 25(-2.2,9.405) 26(2.2,9.405) 27(-2.2,8.605) 28(2.2,8.605) 29(-2.2,7.805) 30(2.2,7.805) 31(-2.2,7.005) 32(2.2,7.005) 33(-2.2,6.205) 34(2.2,6.205) 35(-2.2,5.405) 36(2.2,5.405) 37(-2.2,4.605) 38(2.2,4.605) 39(-2.2,3.805) 40(2.2,3.805) 41(-2.2,3.005) 42(2.2,3.005) 43(-2.2,2.205) 44(2.2,2.205) 45(-2.2,1.405) 46(2.2,1.405) 47(-2.2,0.605) 48(2.2,0.605) 49(-2.2,-0.195) 50(2.2,-0.195) 51(-2.2,-0.995) 52(2.2,-0.995) 53(-2.2,-1.795) 54(2.2,-1.795) 55(-2.2,-2.595) 56(2.2,-2.595) 57(-2.2,-3.395) 58(2.2,-3.395) 59(-2.2,-4.195) 60(2.2,-4.195) 61(-2.2,-4.995) 62(2.2,-4.995) 63(-2.2,-5.795) 64(2.2,-5.795) 65(-2.2,-6.595) 66(2.2,-6.595) 67(-2.2,-7.395) 68(2.2,-7.395) 69(-2.2,-8.195) 70(2.2,-8.195) 71(-2.2,-8.995) 72(2.2,-8.995) 73(-2.2,-9.795) 74(2.2,-9.795) 75(-2.2,-10.595) 76(2.2,-10.595) 77(-2.2,-11.395) 78(2.2,-11.395) 79(-2.2,-12.195) 80(2.2,-12.195) 81(-2.2,-12.995) 82(2.2,-12.995) 83(-2.2,-13.795) 84(2.2,-13.795) 85(-2.2,-14.595) 86(2.2,-14.595) 87(-2.2,-15.395) 88(2.2,-15.395) 89(-2.2,-16.195) 90(2.2,-16.195) 91(-2.2,-16.995) 92(2.2,-16.995) 93(-2.2,-17.795) 94(2.2,-17.795) 95(-2.2,-18.595) 96(2.2,-18.595) 97(-2.2,-19.395) 98(2.2,-19.395) 99(-2.2,-20.195) 100(2.2,-20.195)
  round 0.8 hole 0.8: 101(0,-22.695)
  round 1.2 hole 1.2: 102(0,21.505)
  silkscreen extent -3.4,-23.69 3.4,23.44
JTAG10PW [mil]
  rect 65x65 hole 35: 1(0,0)
  round 65 hole 35: 2(0,100) 3(100,0) 4(100,100) 5(200,0) 6(200,100) 7(300,0) 8(300,100) 9(400,0) 10(400,100)
  silkscreen extent -200,-120 600,220
K78xx-500R2 [mil] "金升阳非隔离DC/DC"
  round 60 hole 30: 1(-100,0) 2(0,0) 3(100,0)
  silkscreen extent -228,-71 228,226
K78xx-L [mm]
  round 1.8 hole 1: 1(0,2.54) 2(0,0) 3(0,-2.54)
  silkscreen extent 1.5,-5.75 19,5.75
LED_3MM [mil]
  round 50 hole 30: A(0,0) K(100,0)
  silkscreen extent -37,-86 137,86
LQFP64_N [mm] "Thin QFP, 64-Leads, Body 10x10mm, Pitch 0.5mm, IPC Medium Density"
  oval 1.8x0.3 smd: 1(-5.55,3.75) 2(-5.55,3.25) 3(-5.55,2.75) 4(-5.55,2.25) 5(-5.55,1.75) 6(-5.55,1.25) 7(-5.55,0.75) 8(-5.55,0.25) 9(-5.55,-0.25) 10(-5.55,-0.75) 11(-5.55,-1.25) 12(-5.55,-1.75) 13(-5.55,-2.25) 14(-5.55,-2.75) 15(-5.55,-3.25) 16(-5.55,-3.75) 33(5.55,-3.75) 34(5.55,-3.25) 35(5.55,-2.75) 36(5.55,-2.25) 37(5.55,-1.75) 38(5.55,-1.25) 39(5.55,-0.75) 40(5.55,-0.25) 41(5.55,0.25) 42(5.55,0.75) 43(5.55,1.25) 44(5.55,1.75) 45(5.55,2.25) 46(5.55,2.75) 47(5.55,3.25) 48(5.55,3.75)
  oval 0.3x1.8 smd: 17(-3.75,-5.55) 18(-3.25,-5.55) 19(-2.75,-5.55) 20(-2.25,-5.55) 21(-1.75,-5.55) 22(-1.25,-5.55) 23(-0.75,-5.55) 24(-0.25,-5.55) 25(0.25,-5.55) 26(0.75,-5.55) 27(1.25,-5.55) 28(1.75,-5.55) 29(2.25,-5.55) 30(2.75,-5.55) 31(3.25,-5.55) 32(3.75,-5.55) 49(3.75,5.55) 50(3.25,5.55) 51(2.75,5.55) 52(2.25,5.55) 53(1.75,5.55) 54(1.25,5.55) 55(0.75,5.55) 56(0.25,5.55) 57(-0.25,5.55) 58(-0.75,5.55) 59(-1.25,5.55) 60(-1.75,5.55) 61(-2.25,5.55) 62(-2.75,5.55) 63(-3.25,5.55) 64(-3.75,5.55)
  silkscreen extent -5.68,-4.25 4.25,4.57, body extent -5,-5 5,5, height 1.6
SIM_PUSH [mm]
  rrect50% 2x3 smd: 0(-9.8,-24.5) 0(9.8,-24.5)
  rrect50% 0.8x2 smd: 1(3.41,-0.5) 2(0.87,-0.5) 3(-1.67,-0.5) 5(2.14,-0.5) 6(-0.4,-0.5) 7(-2.94,-0.5)
  silkscreen extent -9.6,-28 9.6,0
SO-8_N [mm] "SOIC, 8-Leads, Body 4.9x3.9mm, Pitch 1.27mm, IPC Medium Density"
  oval 2.2x0.6 smd: 1(-2.4,1.905) 2(-2.4,0.635) 3(-2.4,-0.635) 4(-2.4,-1.905) 5(2.4,-1.905) 6(2.4,-0.635) 7(2.4,0.635) 8(2.4,1.905)
  silkscreen extent -2.52,-2.5 0.9,2.88, body extent -1.95,-2.45 1.95,2.45, height 1.75
SO-8N [mil]
  rect 80x24 smd: 1(0,0)
  oval 80x24 smd: 2(0,-50) 3(0,-100) 4(0,-150) 5(220,-150) 6(220,-100) 7(220,-50) 8(220,0)
  silkscreen extent 60,-175 160,25
SOD882 [mil] "SOD882"
  rect 11.8x23.6 smd: 1(-13.5,0) 2(14.1,0)
  silkscreen extent -25,-18 26,18
SOT-23 [mm] "SOT-23; 3 Leads; Body 3.0 x 2.6 mm, inc. leads (LxW max)"
  rect 0.9x0.95 smd: 1(-0.95,-1.25) 2(0.95,-1.25) 3(0,1.25)
  silkscreen extent -2.07,-1.37 1.3,1.25
SOT-23-6 [mm]
  rect 1.651x0.635 smd: 1(0,0)
  oval 1.651x0.635 smd: 2(0,-0.95) 3(0,-1.9) 4(3,-1.9) 5(3,-0.95) 6(3,0)
  silkscreen extent 0,-2.85 3,0.9
SOT-223 [mm]
  rect 1.1x2.15 smd: 1(0,0) 2(2.3,0) 3(4.6,0)
  rect 3.5x2.15 smd: 4(2.3,6.2)
  silkscreen extent -1.05,1.47 5.65,4.72
SW5-SO [mm]
  rect 0.5x1.5 smd: 1(0,0) 2(1.27,0) 3(2.54,0) 4(3.81,0) 5(5.08,0) 6(5.08,7) 7(3.81,7) 8(2.54,7) 9(1.27,7) 10(0,7)
  silkscreen extent -1.8,0.99 6.35,5.21
SW8-SO [mm]
  rect 0.5x1.5 smd: 1(0,0) 2(1.27,0) 3(2.54,0) 4(3.81,0) 5(5.08,0) 6(6.35,0) 7(7.62,0) 8(8.89,0) 9(8.89,7) 10(7.62,7) 11(6.35,7) 12(5.08,7) 13(3.81,7) 14(2.54,7) 15(1.27,7) 16(0,7)
  silkscreen extent -1.8,0.99 10.16,5.21
TCC-B [mm]
  rect 2x2.2 smd: 1(0,0) 2(3.5,0)
  silkscreen extent -1.75,-1.5 4.75,1.5
th126_196c_13c [mil] "TH126_196C_13C"
  round 25 hole 13: 1(-67.2,60.1) 2(-90,0) 3(-63.6,-63.6) 4(0,-90) 5(63.7,-63.6) 6(90,0) 7(63.7,63.7) 8(0,90)
  round 116 hole 126: " "(0,0)
TSSOP16 [mm] "Shrink Small Outline; 16 Leads; Body Width 4.4 mm; Pitch 0.65 mm"
  rect 0.3x1.65 smd: 1(-2.275,-2.775) 2(-1.625,-2.775) 3(-0.975,-2.775) 4(-0.325,-2.775) 5(0.325,-2.775) 6(0.975,-2.775) 7(1.625,-2.775) 8(2.275,-2.775) 9(2.275,2.775) 10(1.625,2.775) 11(0.975,2.775) 12(0.325,2.775) 13(-0.325,2.775) 14(-0.975,2.775) 15(-1.625,2.775) 16(-2.275,2.775)
  silkscreen extent -3.1,-2.9 2.55,1.55
XTAL2 [mil]
  round 62 hole 28: 1(-140,110) 2(-140,-90)
  silkscreen extent -240,-190 -40,210
XTAL_32.768 [mm]
  round 1 hole 0.5: 1(0,0) 2(0,1.5)
  silkscreen extent 1.5,-1 10,2.5
ZWD_35DP_UART-3G [mil]
  round 236.22 hole 118.11: 0(2401,150) 0(2401,1750)
  rect 60x60 hole 36: J1-1(100,1650) J2-1(200,1650) J3-1(2500,1150) J4-1(2400,1150)
  round 60 hole 30: J1-2(100,1550)
  round 60 hole 36: J1-3(100,1450) J1-4(100,1350) J1-5(100,1250) J1-6(100,1150) J1-7(100,1050) J1-8(100,950) J1-9(100,850) J1-10(100,750) J1-11(100,650) J1-12(100,550) J1-13(100,450) J1-14(100,350) J1-15(100,250) J2-2(200,1550) J2-3(200,1450) J2-4(200,1350) J2-5(200,1250) J2-6(200,1150) J2-7(200,1050) J2-8(200,950) J2-9(200,850) J2-10(200,750) J2-11(200,650) J2-12(200,550) J2-13(200,450) J2-14(200,350) J2-15(200,250) J3-2(2500,1050) J3-3(2500,950) J3-4(2500,850) J3-5(2500,750) J4-2(2400,1050) J4-3(2400,950) J4-4(2400,850) J4-5(2400,750)
  silkscreen extent 0,0 2601,1900

## Part data
C1 C2 C3 C4 C5 C6 C7 C8 C9 C10 C11 C12 C13 C14 C15 C16 C17 C18 C20 C201 C202 C203 C204: library part C-SMD, "SMD"
C19 C21 C22 C23 C24 C25 C26 C27 C28 C29 C30 C31 C32 C33 C34 C35 C36 C37 C38 C39 C40 C41 C42 C43 C44 C45 C46 C47 C48 C49 C50 C51 C54 C55 C56 C57 C58 C59 C60 C61 C62 C63 C64 C65 C66 C67 C68 C69 C70 C71 C72 C73 C74 C75 C76 C77 C78 C79 C80 C81 C82 C83 C86 C87 C88 C89 C90 C91 C92 C93 C94 C95 C96 C97 C98 C99 C100 C101 C102 C103 C104 C105 C106 C107 C108 C109 C110 C111 C112 C113 C114 C115 C118 C119 C120 C121 C122 C123 C124 C125 C126 C127 C128 C129 C130 C131 C132 C134 C135 C136 C137 C138 C139 C140 C141 C142 C143 C144 C145 C146 C147 C148 C150 C151 C152 C153 C154 C155 C157 C158 C159 C160 C161 C162 C163 C180 C181 C182 C183 C184 C185 C186 C187 C188 C189 C190 C191 C192 C193: library part C-X5R/X7R, "C-X5R/X7R"
C52 C53 C84 C85 C116 C117 C133 C149 C156: library part 10uF/16V-B
C169: "CD11"
C170: library part 0.1uF, "CC"
D8: library part "Diode 1N4148", "High Conductance Fast Diode"
DD1: library part "DIODE BREAKDOWN"
HG1 HG2 HG3 HG4 HG5 HG6: library part MOUNTING_HOLE, "Sym, PCB mounting holes, th126_196c_13c"
J1 J2: library part SIP3-2.54, "CN-SIP3-2.54"
J9: library part Uart0_SDCard
JP2: library part "Header 5X2", "Header, 5-Pin, Dual row"
L1 L2 L3 L4 L5 L6: "Inductor"
L8: library part Inductor
P1: "Header, 12-Pin"
P2: "Header, 10-Pin"
P3: "Header, 2-Pin"
P4: library part "Header 4", "Header, 4-Pin"
P5: library part "Header 8X2A", "Header, 8-Pin, Dual row"
P101: library part IDC100
P102: library part IDC102
Q1 Q2 Q3 Q4 Q5 Q6 Q7 Q8: library part PNP, "PNP Transistor"
R1 R2 R3 R4 R5 R6 R7 R8 R9 R10 R12 R13 R22 R23 R25 R26 R27 R28 R29 R30 R31 R32 R33 R34 R43 R44 R46 R47 R48 R49 R50 R51 R52 R53 R54 R55 R64 R65 R66 R68 R69 R70 R77 R79 R80 R81 R82 R83 R87 R89: library part "Resistor - 1%", "Resistor - 1%"
R11 R14 R15 R16 R17 R18 R19 R20 R21 R24 R35 R36 R37 R38 R39 R40 R41 R42 R45 R56 R57 R58 R59 R60 R61 R62 R63 R67 R71 R72 R73 R74 R75 R76 R78 R84 R85 R86 R88 R90 R91 R92 R93 R94 R119 R120 R121 R122 R123 R124 R125 R126 R127 R128 R129 R130 R131 R132 R133 R134 R135 R136 R137 R138 R139 R140 R141 R142 R143 R144 R145 R146 R147 R148 R149 R150 R151: library part "Resistor - 5%", "Resistor - 5%"
R104 R105 R106: library part R-0805R
R107 R108 R109 R160 R161 R162 R163 R164 R165 R166 R167 R168: library part 1K-0805R
S1: "DIP Switch"
U1 U2 U3 U4 U40: library part K78xx-500R2, "K78xx-500R2"
U5: library part AMS1117, "AMS1117"
U29: "Precision Rail-to-Rail Input and Output Operational Amplifier"
U33: "3.0V TO 5.5V, Low-Power, up to 1Mbps, True RS-232 Transceiver Using Four 0.1礔 External Capacitor"
U34: "STM32 ARM-based 32-bit MCU with 128 Kbytes Flash, 64-pin LQFP, Industrial Temperature"
U36: library part ZWD-35DP-UART-3G
U37: library part SIM_PUSH
XTAL1 XTAL2: library part XTAL, "CRYSTAL"

## Free pads (board coordinates)
  round 204.72 hole 125.98: 0(102.36,107.36) 1(102.36,2264.84) 2(2259.84,2264.84) 3(2259.84,107.36)
  round 70.87 hole 39.37: 0(1584.81,-1507.48)
  rect 860x130 smd far side: 0(5718,2351)
  rect 135x333 smd: 1(1986,938)

## Via types
v1: diameter 21, hole 10, Top Layer to Bottom Layer, 244 vias
v2: diameter 20, hole 10, Top Layer to Bottom Layer, 84 vias
v3: diameter 32, hole 16, Top Layer to Bottom Layer, 11 vias
v4: diameter 24, hole 12, Top Layer to Bottom Layer, 7 vias
v5: diameter 39.37, hole 19.68, Top Layer to Bottom Layer, 3 vias
v6: diameter 30, hole 15, Top Layer to Bottom Layer, 1 vias

## Nets (pads, with @x,y where several pads share a name; then routed paths per layer and width w, separated by ;. In a path a pad name is that pad's centre, name@x,y a point inside that pad or via, vN(x,y) a via of type N, cw(c..) or ccw(c..) an arc to the next point about the centre after c; other vN are vias at no path point)
3G_FULL: U34.14 U36.J2-8 | length 2448.7
  Top Layer w7: U34.14@1879.31,1631.79 2005.26,1631.79 2042.99,1669.52 3435.48,1669.52 3862.48,1242.52 4064.81,1242.52 U36.J2-8@4114.81,1192.52
3G_LINK: D2.K U34.15 U36.J2-7 | length 3944.7
  Top Layer w7: U34.15@1879.31,1651.47 1997.1,1651.47 2035.63,1690 3480,1690 3827.48,1342.52 4064.81,1342.52 U36.J2-7@4114.81,1292.52 ; 4553.15,1292.52 4614.15,1292.52 4684.81,1363.18 D2.K@4684.81,2292.52
  Top Layer w10: U36.J2-7@4114.81,1292.52 4553.15,1292.52
3G_RST_CTR: R108.2 U34.11 U36.J1-9 | length 2879.6
  Top Layer w7: U34.11@1879.31,1572.73 1925.36,1572.73 1945.57,1552.52 1970.15,1552.52 2069.1,1651.47 3388.53,1651.47 3947.48,1092.52 U36.J1-9@4014.81,1092.52
  Bottom Layer w10: U36.J1-9@4014.81,1067.52 cw(c4014.81,1007.16) 4057.49,1049.84 cw(c4100.16,1092.52) U36.J1-9@4039.81,1092.52 ; U36.J1-9@4014.81,1077.52 cw(c4014.81,1041.31) 4040.42,1066.91 cw(c4066.02,1092.52) U36.J1-9@4029.81,1092.52 ; U36.J1-9@4014.81,1092.52 4069.81,1037.52 R108.2@4189.81,1037.52 ; 4165.67,1037.52 cw(c4165.67,1013.38) R108.2@4182.74,1030.45 ; 4165.67,1037.52 ccw(c4165.67,1061.66) R108.2@4182.74,1044.59 ; 4165.67,1037.52 cw(c4165.67,1013.38) R108.2@4182.74,1030.45 ; 4165.67,1037.52 ccw(c4165.67,1061.66) R108.2@4182.74,1044.59 ; 4165.67,1037.52 ccw(c4165.67,1061.66) R108.2@4182.74,1044.59 ; 4165.67,1037.52 cw(c4165.67,1013.38) R108.2@4182.74,1030.45
3G_RXD_SET: R94.1 U36.J2-5 | length 3659.6
  Top Layer w7: v2(4384.81,-555.48) 4551.15,-721.82 4839.15,-721.82 4884.81,-767.48 4884.81,-997.48 4849.81,-1032.48 R94.1@4714.81,-1032.48 ; R94.1@4722.94,-1040.61 cw(c4742.57,-1060.24) 4742.57,-1032.48 ; R94.1@4722.94,-1040.61 cw(c4742.57,-1060.24) 4742.57,-1032.48 ; R94.1@4722.94,-1040.61 cw(c4742.57,-1060.24) 4742.57,-1032.48 ; R94.1@4722.94,-1024.35 ccw(c4742.57,-1004.72) 4742.57,-1032.48 ; R94.1@4722.94,-1024.35 ccw(c4742.57,-1004.72) 4742.57,-1032.48 ; R94.1@4722.94,-1024.35 ccw(c4742.57,-1004.72) 4742.57,-1032.48
  Bottom Layer w7: U36.J2-5@4114.81,1492.52 4319.81,1492.52 4384.81,1427.52 v2(4384.81,-555.48) ; U36.J2-5@4123.65,1483.68 cw(c4144.99,1462.34) 4144.99,1492.52 cw(c4144.99,1522.7) U36.J2-5@4123.65,1501.36 ; U36.J2-5@4128.6,1478.73 cw(c4161.89,1445.44) 4161.89,1492.52 cw(c4161.89,1539.6) U36.J2-5@4128.6,1506.31 ; U36.J2-5@4133.55,1473.78 cw(c4178.79,1428.54) 4178.79,1492.52 cw(c4178.79,1556.5) U36.J2-5@4133.55,1511.26 ; v2@4380.21,-550.88 ccw(c4369.12,-539.79) 4384.81,-539.79 ccw(c4400.5,-539.79) v2@4389.41,-550.88
3G_SMS/3G_CTR: R107.2 U34.10 U36.J1-10 | length 2913.1
  Top Layer w7: U34.10@1879.31,1553.05 1922.62,1553.05 1943.15,1532.52 1972.15,1532.52 2071.42,1631.79 3321.87,1631.79 3961.14,992.52 U36.J1-10@4014.81,992.52
  Bottom Layer w10: U36.J1-10@4014.81,967.52 cw(c4014.81,907.16) 4057.49,949.84 cw(c4100.16,992.52) U36.J1-10@4039.81,992.52 ; U36.J1-10@4014.81,977.52 cw(c4014.81,941.31) 4040.42,966.91 cw(c4066.02,992.52) U36.J1-10@4029.81,992.52 ; U36.J1-10@4014.81,992.52 4069.81,937.52 R107.2@4189.81,937.52 ; 4165.67,937.52 cw(c4165.67,913.38) R107.2@4182.74,930.45 ; 4165.67,937.52 ccw(c4165.67,961.66) R107.2@4182.74,944.59 ; 4165.67,937.52 cw(c4165.67,913.38) R107.2@4182.74,930.45 ; 4165.67,937.52 ccw(c4165.67,961.66) R107.2@4182.74,944.59 ; 4165.67,937.52 ccw(c4165.67,961.66) R107.2@4182.74,944.59 ; 4165.67,937.52 cw(c4165.67,913.38) R107.2@4182.74,930.45
3G_TXD_SET: R92.1 U36.J2-4 | length 3624.8
  Top Layer w7: v2(4436.15,-664.48) 4539.15,-767.48 4809.81,-767.48 4844.81,-802.48 4844.81,-942.48 4814.81,-972.48 R92.1@4714.81,-972.48 ; R92.1@4722.94,-980.61 cw(c4742.57,-1000.24) 4742.57,-972.48 ; R92.1@4722.94,-980.61 cw(c4742.57,-1000.24) 4742.57,-972.48 ; R92.1@4722.94,-980.61 cw(c4742.57,-1000.24) 4742.57,-972.48 ; R92.1@4722.94,-964.35 ccw(c4742.57,-944.72) 4742.57,-972.48 ; R92.1@4722.94,-964.35 ccw(c4742.57,-944.72) 4742.57,-972.48 ; R92.1@4722.94,-964.35 ccw(c4742.57,-944.72) 4742.57,-972.48
  Bottom Layer w7: U36.J2-4@4114.81,1592.52 4299.81,1592.52 4434.81,1457.52 4434.81,-664.48 v2(4436.15,-664.48) ; U36.J2-4@4123.65,1583.68 cw(c4144.99,1562.34) 4144.99,1592.52 cw(c4144.99,1622.7) U36.J2-4@4123.65,1601.36 ; U36.J2-4@4128.6,1578.73 cw(c4161.89,1545.44) 4161.89,1592.52 cw(c4161.89,1639.6) U36.J2-4@4128.6,1606.31 ; U36.J2-4@4133.55,1573.78 cw(c4178.79,1528.54) 4178.79,1592.52 cw(c4178.79,1656.5) U36.J2-4@4133.55,1611.26 ; v2@4431.55,-659.88 ccw(c4423.69,-652.02) 4434.81,-652.02 ; 4434.81,-645.55 ccw(c4455.08,-645.55) v2@4440.75,-659.88
AD7276_CS1: P101.7 U9.6 | length 1651.2
  Top Layer w7: U9.6@-967.08,-197.48 -885.19,-197.48 -755.19,-67.48 -160.19,-67.48 -113.71,-21 477.29,-21 496.06,-2.23 P101.7@496.06,80.91 ; P101.7@491.57,46.9 cw(c480.74,36.07) 496.06,36.07 cw(c511.38,36.07) P101.7@500.55,46.9
AD7276_CS2: P101.13 U15.6 | length 1075.6
  Top Layer w7: U15.6@-267.08,-192.48 -140.19,-192.48 -56.71,-109 538.29,-109 590.55,-56.74 P101.13@590.55,80.91 ; P101.13@586.06,46.9 cw(c575.23,36.07) 590.55,36.07 cw(c605.87,36.07) P101.13@595.04,46.9
AD7276_CS3: P101.19 U21.6 | length 520.9
  Top Layer w7: U21.6@437.92,-197.48 577.81,-197.48 685.04,-90.25 P101.19@685.04,80.91 ; U21.6@464.28,-203.84 cw(c479.65,-219.21) 479.65,-197.48 cw(c479.65,-175.75) U21.6@464.28,-191.12 ; P101.19@680.55,46.9 cw(c669.72,36.07) 685.04,36.07 cw(c700.36,36.07) P101.19@689.53,46.9
AD7276_CS4: P101.27 U26.6 | length 786.8
  Top Layer w7: P101.27@806.54,46.9 cw(c795.71,36.07) 811.03,36.07 cw(c826.35,36.07) P101.27@815.52,46.9 ; P101.27@811.03,80.91 811.03,-63.7 889.81,-142.48 1179.81,-142.48 1199.81,-162.48 1199.81,-187.48 1189.81,-197.48 U26.6@1142.92,-197.48 ; U26.6@1169.28,-203.84 cw(c1184.65,-219.21) 1184.65,-197.48 ; U26.6@1169.28,-203.84 cw(c1184.65,-219.21) 1184.65,-197.48 ; U26.6@1169.28,-203.84 cw(c1184.65,-219.21) 1184.65,-197.48 ; U26.6@1169.28,-191.12 ccw(c1184.65,-175.75) 1184.65,-197.48 ; U26.6@1169.28,-191.12 ccw(c1184.65,-175.75) 1184.65,-197.48 ; U26.6@1169.28,-191.12 ccw(c1184.65,-175.75) 1184.65,-197.48
AD7276_CS5: P101.18 U30.6 | length 2489.5
  Top Layer w7: U30.6@-962.08,1032.52 -885.19,1032.52 -795.19,1122.52 558.15,1122.52 653.54,1027.13 P101.18@653.54,254.13 ; P101.18@649.05,288.14 ccw(c638.22,298.97) 653.54,298.97 ccw(c668.86,298.97) P101.18@658.03,288.14
AD7276_CS6: P101.12 U10.6 | length 1587.9
  Top Layer w7: U10.6@-262.08,1032.52 498.15,1032.52 559.06,971.61 P101.12@559.06,254.13 ; P101.12@554.57,288.14 ccw(c543.74,298.97) 559.06,298.97 ccw(c574.38,298.97) P101.12@563.55,288.14
AD7276_CS7: P101.32 U16.6 | length 3706.4
  Top Layer w7: U16.6@-967.08,2257.52 -895.19,2257.52 -795.19,2357.52 -177.52,2357.52 134.81,2045.19 134.81,1327.52 179.81,1282.52 713.15,1282.52 874.02,1121.65 P101.32@874.02,254.13 ; P101.32@869.53,288.14 ccw(c858.7,298.97) 874.02,298.97 ccw(c889.34,298.97) P101.32@878.51,288.14
AD7276_CS8: P101.26 U22.6 | length 2821.7
  Top Layer w7: U22.6@-262.08,2252.52 -177.52,2252.52 59.81,2015.19 59.81,1257.52 109.81,1207.52 653.15,1207.52 779.53,1081.14 P101.26@779.53,254.13 ; P101.26@775.04,288.14 ccw(c764.21,298.97) 779.53,298.97 ccw(c794.85,298.97) P101.26@784.02,288.14
AD7276_SCLK1: P101.11 U9.4 | length 1872.8
  Top Layer w7: U9.4@-967.08,-272.28 -864.99,-272.28 -710.19,-117.48 -115.19,-117.48 -78.71,-81 523.29,-81 559.06,-45.23 P101.11@559.06,80.91 ; P101.11@554.57,46.9 cw(c543.74,36.07) 559.06,36.07 cw(c574.38,36.07) P101.11@563.55,46.9 ; U9.4@-940.72,-278.65 cw(c-925.35,-294.01) -925.35,-272.28 ; U9.4@-940.72,-278.65 cw(c-925.35,-294.01) -925.35,-272.28 ; U9.4@-940.72,-278.65 cw(c-925.35,-294.01) -925.35,-272.28 ; U9.4@-940.72,-265.92 ccw(c-925.35,-250.56) -925.35,-272.28 ; U9.4@-940.72,-265.92 ccw(c-925.35,-250.56) -925.35,-272.28 ; U9.4@-940.72,-265.92 ccw(c-925.35,-250.56) -925.35,-272.28
AD7276_SCLK2: P101.17 U15.4 | length 1180.7
  Top Layer w7: U15.4@-267.08,-267.28 -124.99,-267.28 -23.71,-166 563.29,-166 653.54,-75.75 P101.17@653.54,80.91 ; P101.17@649.05,46.9 cw(c638.22,36.07) 653.54,36.07 cw(c668.86,36.07) P101.17@658.03,46.9
AD7276_SCLK3: P101.25 U21.4 | length 607.8
  Top Layer w7: U21.4@437.92,-272.28 442.72,-267.48 594.81,-267.48 779.53,-82.76 P101.25@779.53,80.91 ; P101.25@775.04,46.9 cw(c764.21,36.07) 779.53,36.07 cw(c794.85,36.07) P101.25@784.02,46.9
AD7276_SCLK4: P101.31 U26.4 | length 818.1
  Top Layer w7: P101.31@869.53,46.9 cw(c858.7,36.07) 874.02,36.07 cw(c889.34,36.07) P101.31@878.51,46.9 ; P101.31@874.02,80.91 874.02,-41.69 924.81,-92.48 1224.81,-92.48 1259.81,-127.48 1259.81,-252.48 1240.01,-272.28 U26.4@1142.92,-272.28
AD7276_SCLK5: P101.14 U30.4 | length 2395.2
  Top Layer w7: U30.4@-962.08,957.72 -864.99,957.72 -752.71,1070 515.67,1070 590.55,995.12 P101.14@590.55,254.13 ; P101.14@586.06,288.14 ccw(c575.23,298.97) 590.55,298.97 ccw(c605.87,298.97) P101.14@595.04,288.14
AD7276_SCLK6: P101.8 U10.4 | length 1571.7
  Top Layer w7: U10.4@-262.08,957.72 467.95,957.72 496.06,929.61 P101.8@496.06,254.13 ; P101.8@491.57,288.14 ccw(c480.74,298.97) 496.06,298.97 ccw(c511.38,298.97) P101.8@500.55,288.14 ; U10.4@-235.72,951.35 cw(c-220.35,935.99) -220.35,957.72 ; U10.4@-235.72,951.35 cw(c-220.35,935.99) -220.35,957.72 ; U10.4@-235.72,951.35 cw(c-220.35,935.99) -220.35,957.72 ; U10.4@-235.72,964.08 ccw(c-220.35,979.44) -220.35,957.72 ; U10.4@-235.72,964.08 ccw(c-220.35,979.44) -220.35,957.72 ; U10.4@-235.72,964.08 ccw(c-220.35,979.44) -220.35,957.72
AD7276_SCLK7: P101.28 U16.4 | length 3628.9
  Top Layer w7: U16.4@-967.08,2182.72 -879.99,2182.72 -755.19,2307.52 -197.52,2307.52 84.81,2025.19 84.81,1282.52 134.81,1232.52 668.15,1232.52 811.03,1089.64 P101.28@811.03,254.13 ; P101.28@806.54,288.14 ccw(c795.71,298.97) 811.03,298.97 ccw(c826.35,298.97) P101.28@815.52,288.14
AD7276_SCLK8: P101.20 U22.4 | length 2698.9
  Top Layer w7: U22.4@-262.08,2177.72 -167.72,2177.72 9.81,2000.19 9.81,1207.52 59.81,1157.52 578.15,1157.52 685.04,1050.63 P101.20@685.04,254.13 ; P101.20@680.55,288.14 ccw(c669.72,298.97) 685.04,298.97 ccw(c700.36,298.97) P101.20@689.53,288.14
AD7276_SDATA1: P101.9 U9.5 | length 1817.3
  Top Layer w7: U9.5@-967.08,-234.88 -867.59,-234.88 -725.19,-92.48 -140.19,-92.48 -98.71,-51 507.29,-51 527.56,-30.73 P101.9@527.56,80.91 ; P101.9@523.07,46.9 cw(c512.24,36.07) 527.56,36.07 cw(c542.88,36.07) P101.9@532.05,46.9 ; U9.5@-940.72,-241.25 cw(c-925.35,-256.61) -925.35,-234.88 ; U9.5@-940.72,-241.25 cw(c-925.35,-256.61) -925.35,-234.88 ; U9.5@-940.72,-241.25 cw(c-925.35,-256.61) -925.35,-234.88 ; U9.5@-940.72,-228.52 ccw(c-925.35,-213.15) -925.35,-234.88 ; U9.5@-940.72,-228.52 ccw(c-925.35,-213.15) -925.35,-234.88 ; U9.5@-940.72,-228.52 ccw(c-925.35,-213.15) -925.35,-234.88
AD7276_SDATA2: P101.15 U15.5 | length 1230.5
  Top Layer w7: U15.5@-267.08,-229.88 -132.59,-229.88 -41.71,-139 549.29,-139 622.05,-66.24 P101.15@622.05,80.91 ; P101.15@617.56,46.9 cw(c606.73,36.07) 622.05,36.07 cw(c637.37,36.07) P101.15@626.54,46.9 ; U15.5@-240.72,-236.25 cw(c-225.35,-251.61) -225.35,-229.88 ; U15.5@-240.72,-236.25 cw(c-225.35,-251.61) -225.35,-229.88 ; U15.5@-240.72,-236.25 cw(c-225.35,-251.61) -225.35,-229.88 ; U15.5@-240.72,-223.52 ccw(c-225.35,-208.15) -225.35,-229.88 ; U15.5@-240.72,-223.52 ccw(c-225.35,-208.15) -225.35,-229.88 ; U15.5@-240.72,-223.52 ccw(c-225.35,-208.15) -225.35,-229.88
AD7276_SDATA3: P101.21 U21.5 | length 645.2
  Top Layer w7: U21.5@437.92,-234.88 587.41,-234.88 716.54,-105.75 P101.21@716.54,80.91 ; P101.21@712.05,46.9 cw(c701.22,36.07) 716.54,36.07 cw(c731.86,36.07) P101.21@721.03,46.9 ; U21.5@464.28,-241.25 cw(c479.65,-256.61) 479.65,-234.88 ; U21.5@464.28,-241.25 cw(c479.65,-256.61) 479.65,-234.88 ; U21.5@464.28,-241.25 cw(c479.65,-256.61) 479.65,-234.88 ; U21.5@464.28,-228.52 ccw(c479.65,-213.15) 479.65,-234.88 ; U21.5@464.28,-228.52 ccw(c479.65,-213.15) 479.65,-234.88 ; U21.5@464.28,-228.52 ccw(c479.65,-213.15) 479.65,-234.88
AD7276_SDATA4: P101.29 U26.5 | length 855.1
  Top Layer w7: P101.29@838.03,46.9 cw(c827.2,36.07) 842.52,36.07 cw(c857.84,36.07) P101.29@847.01,46.9 ; P101.29@842.52,80.91 842.52,-55.19 904.81,-117.48 1209.81,-117.48 1229.81,-137.48 1229.81,-212.48 1207.41,-234.88 U26.5@1142.92,-234.88 ; U26.5@1169.28,-241.25 cw(c1184.65,-256.61) 1184.65,-234.88 ; U26.5@1169.28,-241.25 cw(c1184.65,-256.61) 1184.65,-234.88 ; U26.5@1169.28,-241.25 cw(c1184.65,-256.61) 1184.65,-234.88 ; U26.5@1169.28,-228.52 ccw(c1184.65,-213.15) 1184.65,-234.88 ; U26.5@1169.28,-228.52 ccw(c1184.65,-213.15) 1184.65,-234.88 ; U26.5@1169.28,-228.52 ccw(c1184.65,-213.15) 1184.65,-234.88
AD7276_SDATA5: P101.16 U30.5 | length 2545.2
  Top Layer w7: U30.5@-962.08,995.12 -877.59,995.12 -777.71,1095 540.67,1095 622.05,1013.62 P101.16@622.05,254.13 ; P101.16@617.56,288.14 ccw(c606.73,298.97) 622.05,298.97 ccw(c637.37,298.97) P101.16@626.54,288.14 ; U30.5@-935.72,988.75 cw(c-920.35,973.39) -920.35,995.12 ; U30.5@-935.72,988.75 cw(c-920.35,973.39) -920.35,995.12 ; U30.5@-935.72,988.75 cw(c-920.35,973.39) -920.35,995.12 ; U30.5@-935.72,1001.48 ccw(c-920.35,1016.85) -920.35,995.12 ; U30.5@-935.72,1001.48 ccw(c-920.35,1016.85) -920.35,995.12 ; U30.5@-935.72,1001.48 ccw(c-920.35,1016.85) -920.35,995.12